# Altium PCB host_board.PcbDoc (part 1 of 3)
Units mm, origin at the board's own origin, x right, y up, seen from the top; angles counter-clockwise.
Board outline 82.44 x 55.58 mm, 4 copper layers (Top Layer, GND, Power, Bottom Layer), stack 1.594 mm thick; 220 components, 249 nets, 1076 pads, 228 vias.
Unrouted connection lines stored in the file: 688.
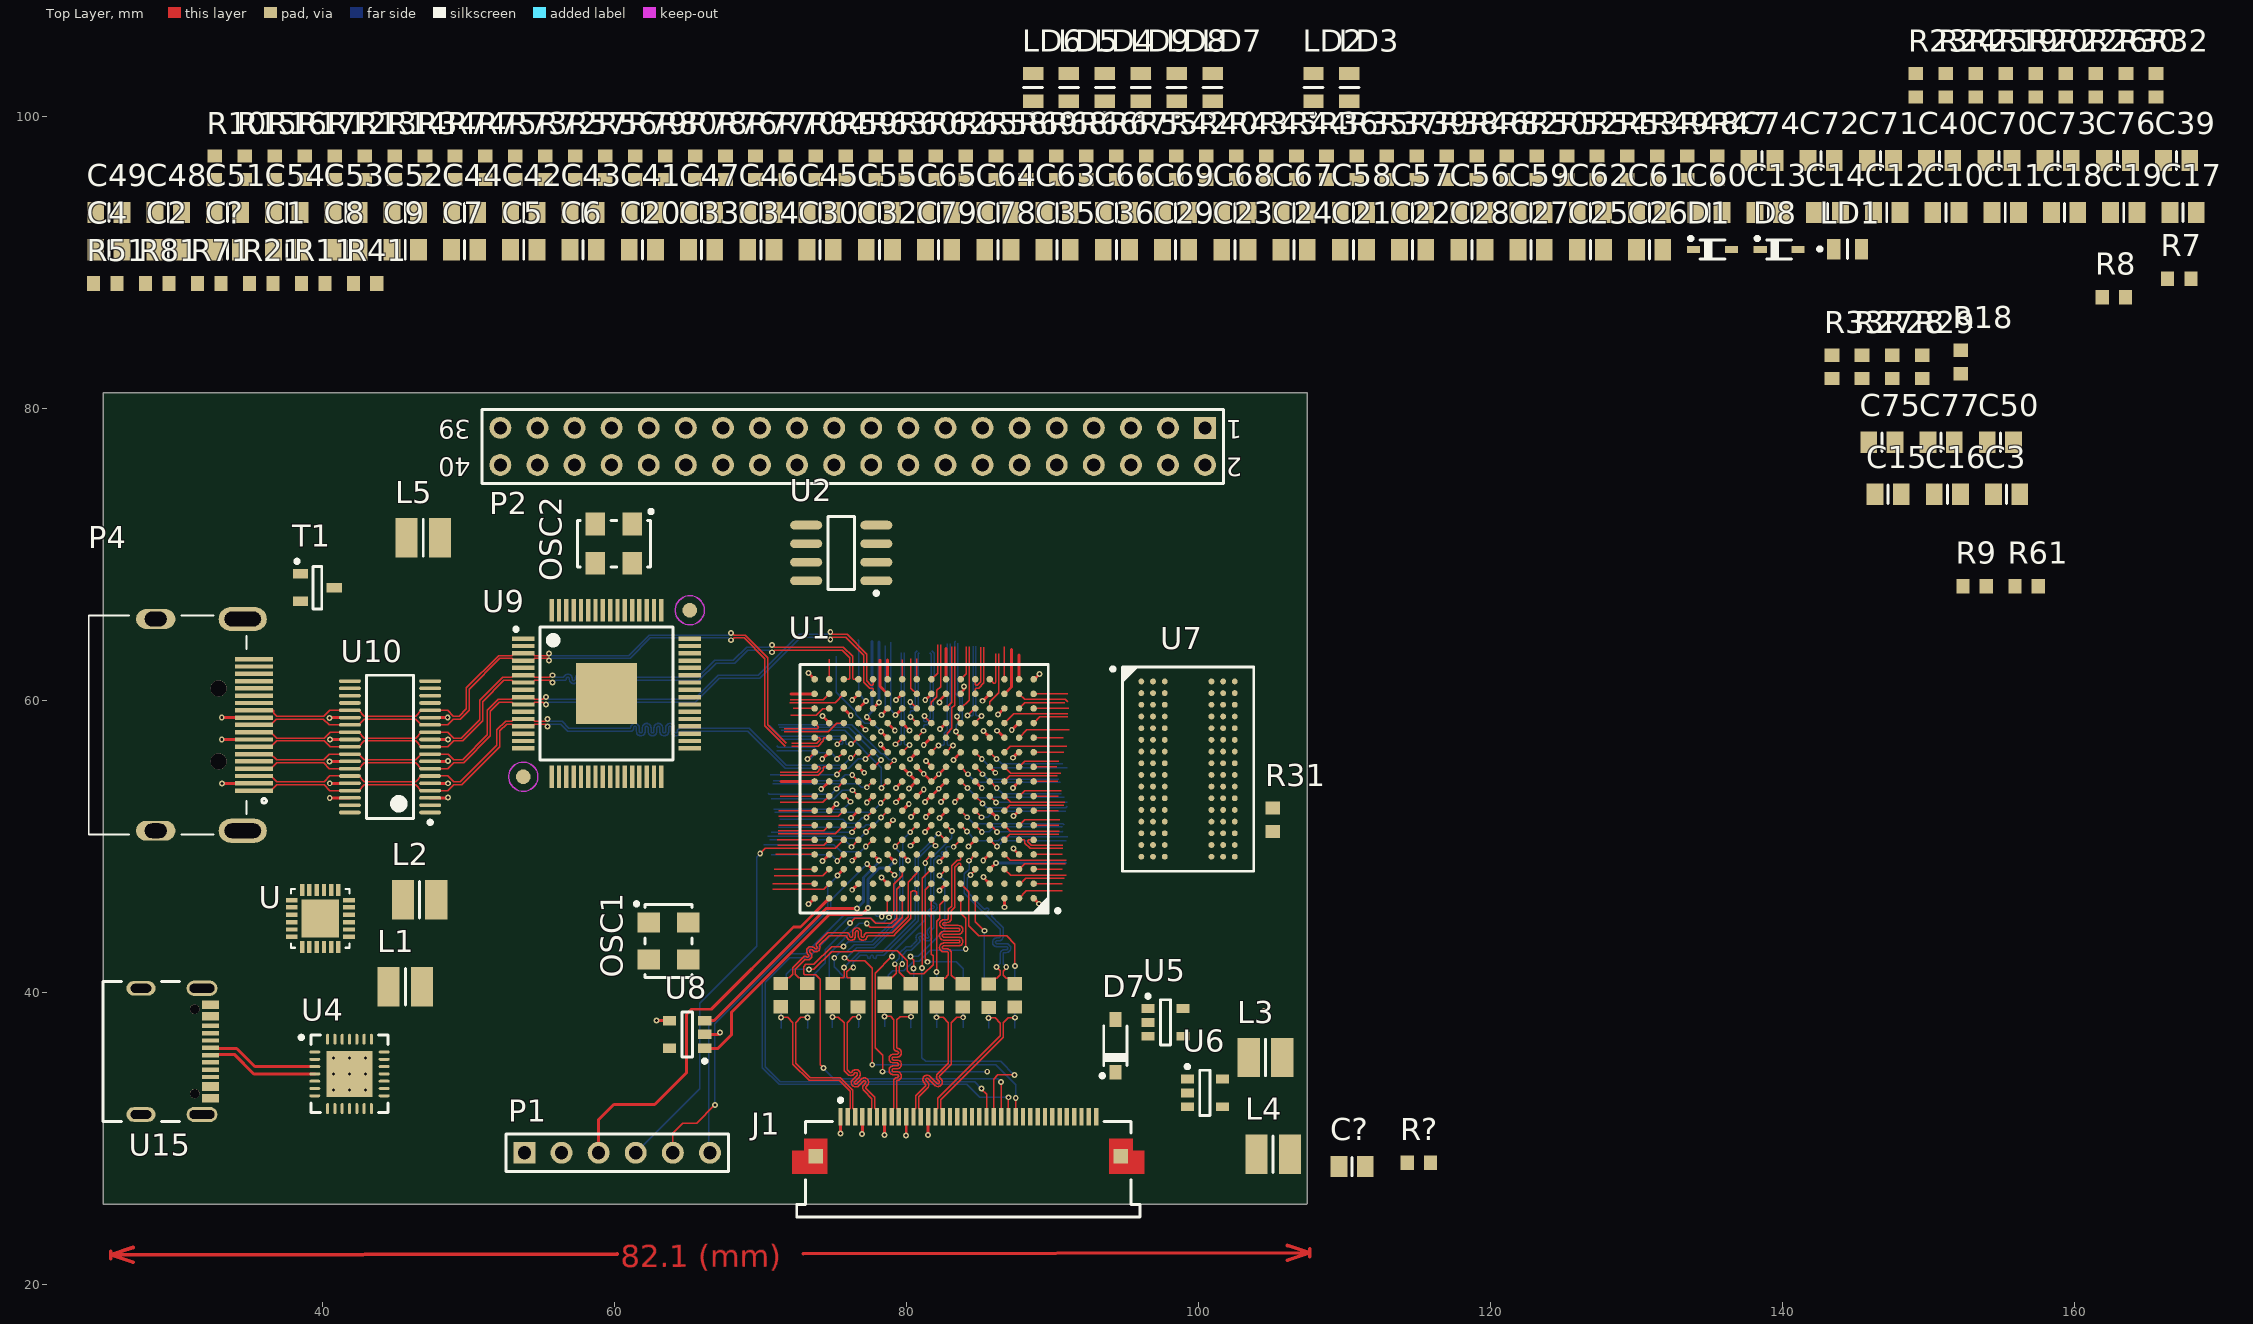
[diagram p0: Top Layer view]
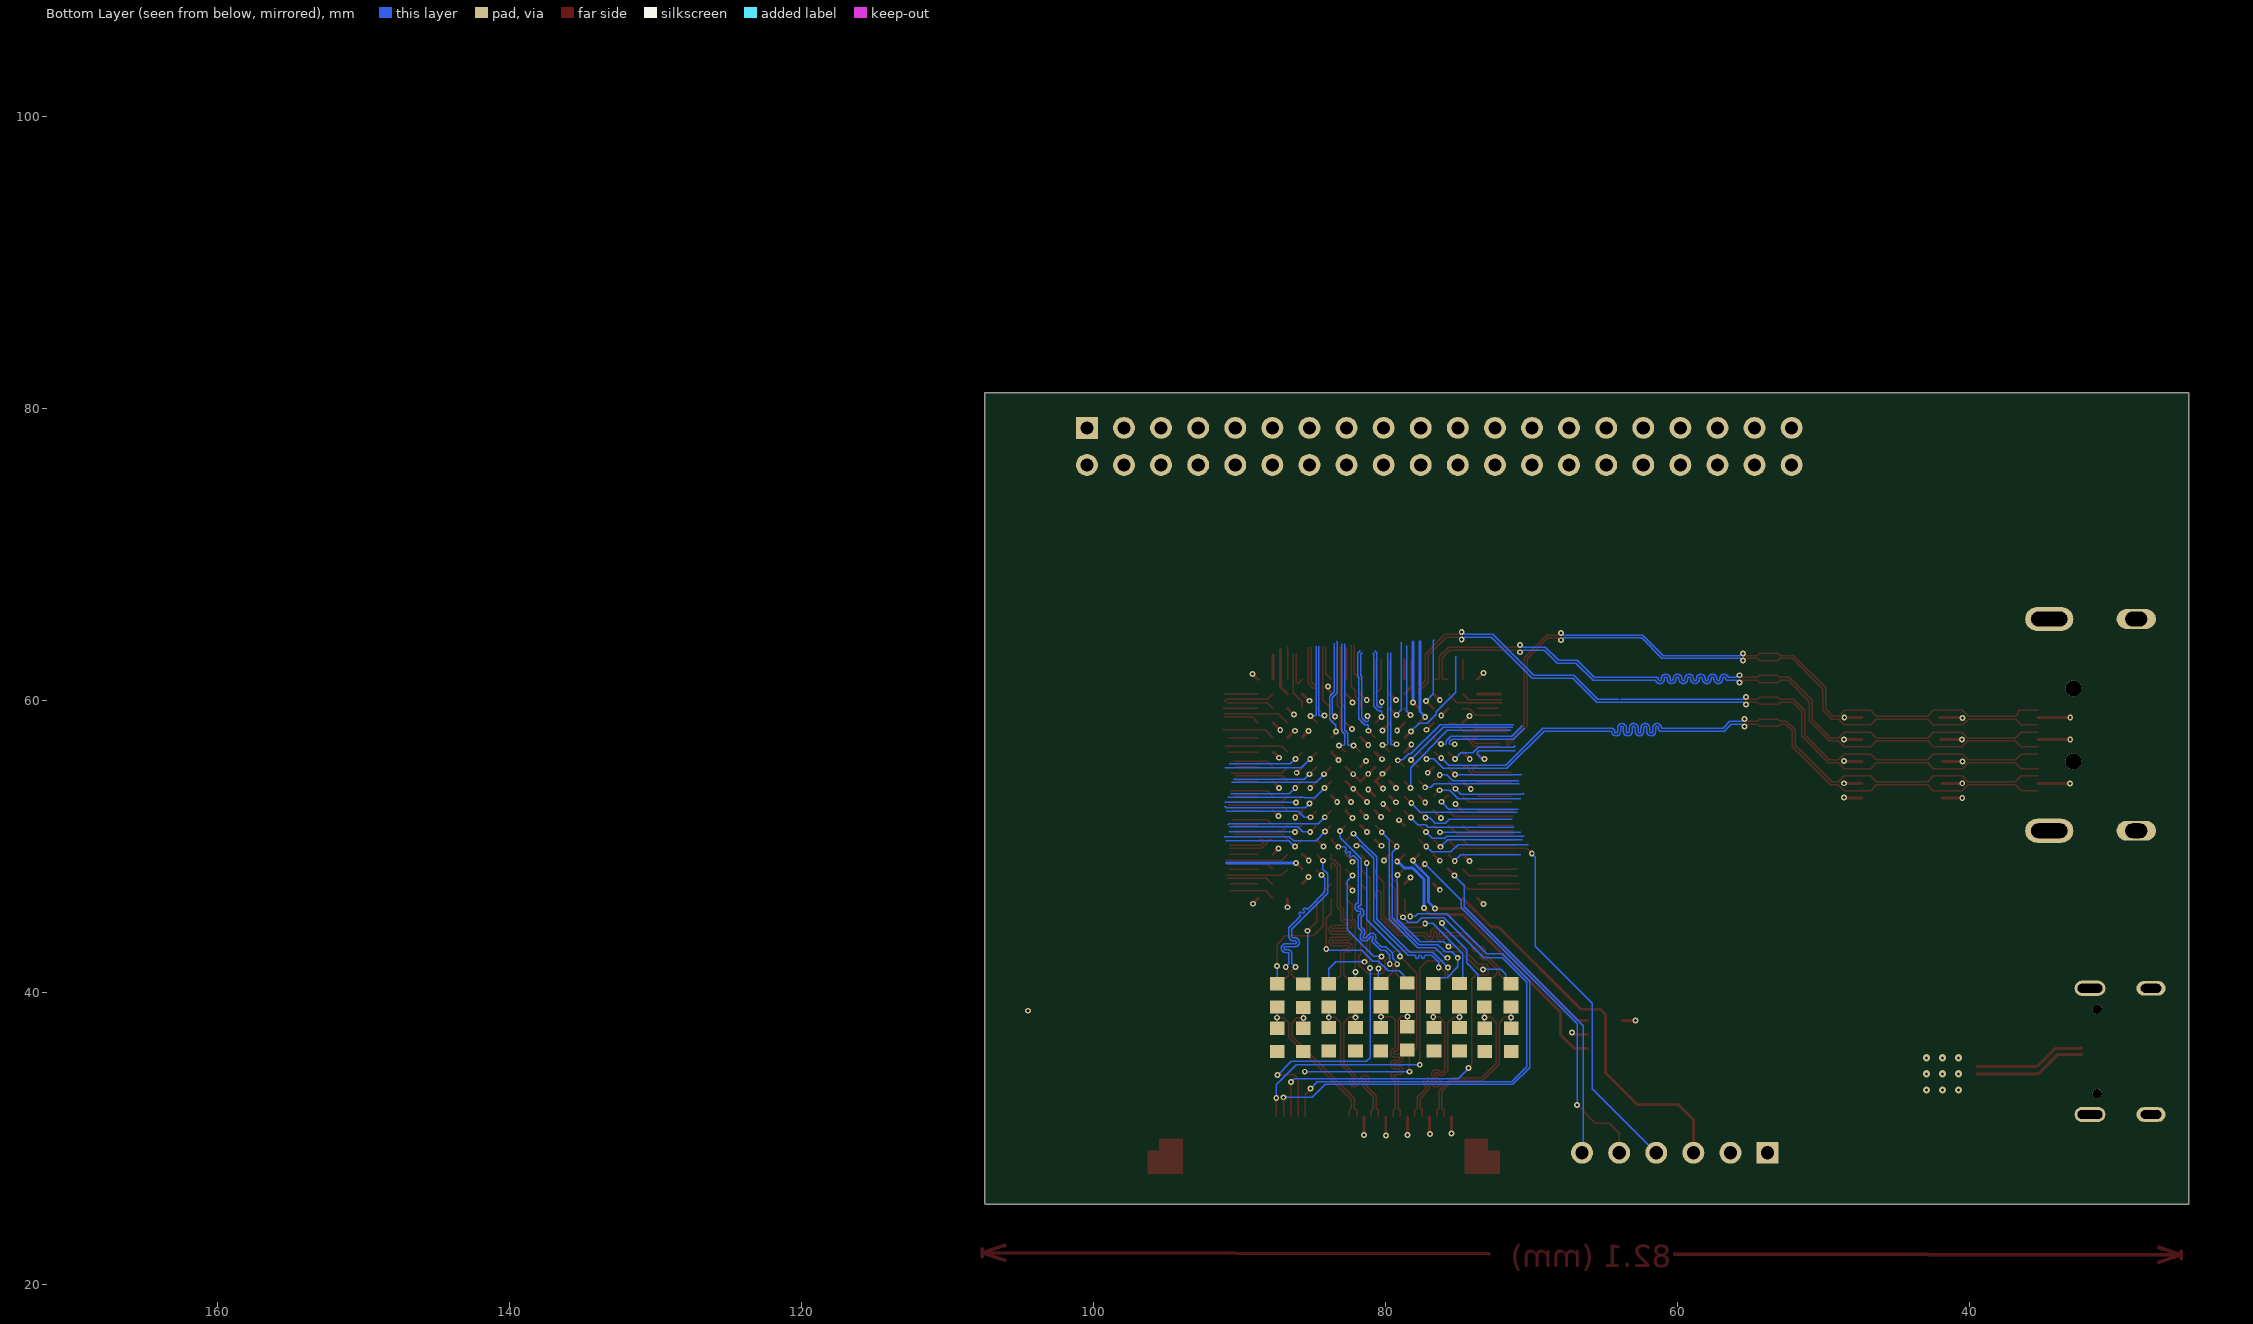
[diagram p1: Bottom Layer view, seen from below]
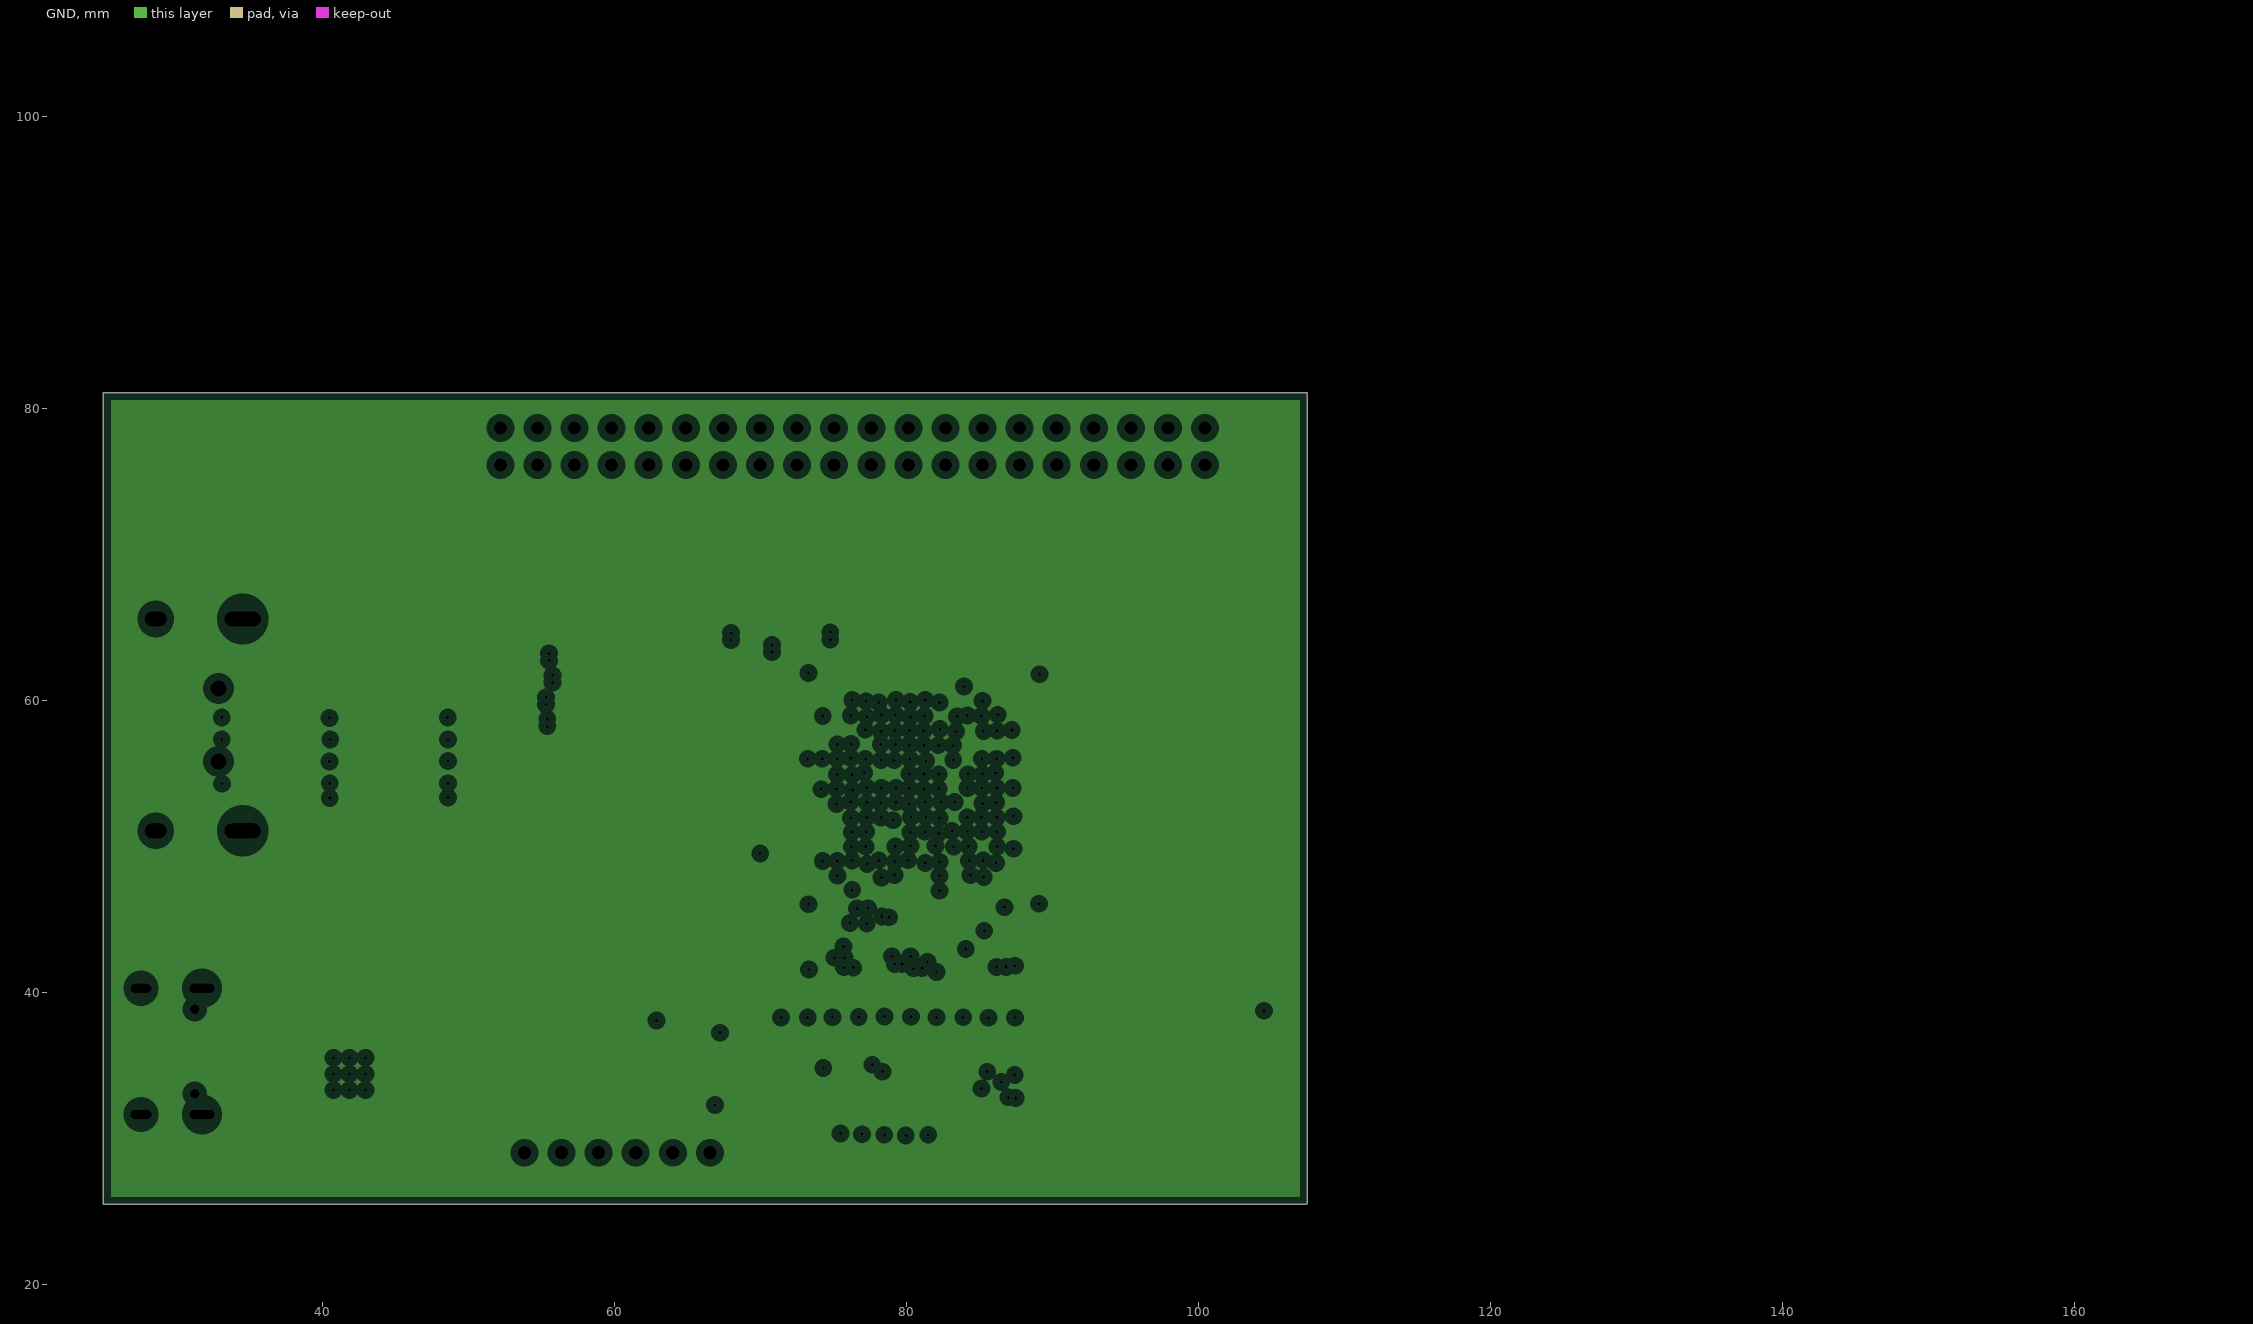
[diagram p2: GND, clearances drawn from the general rule]
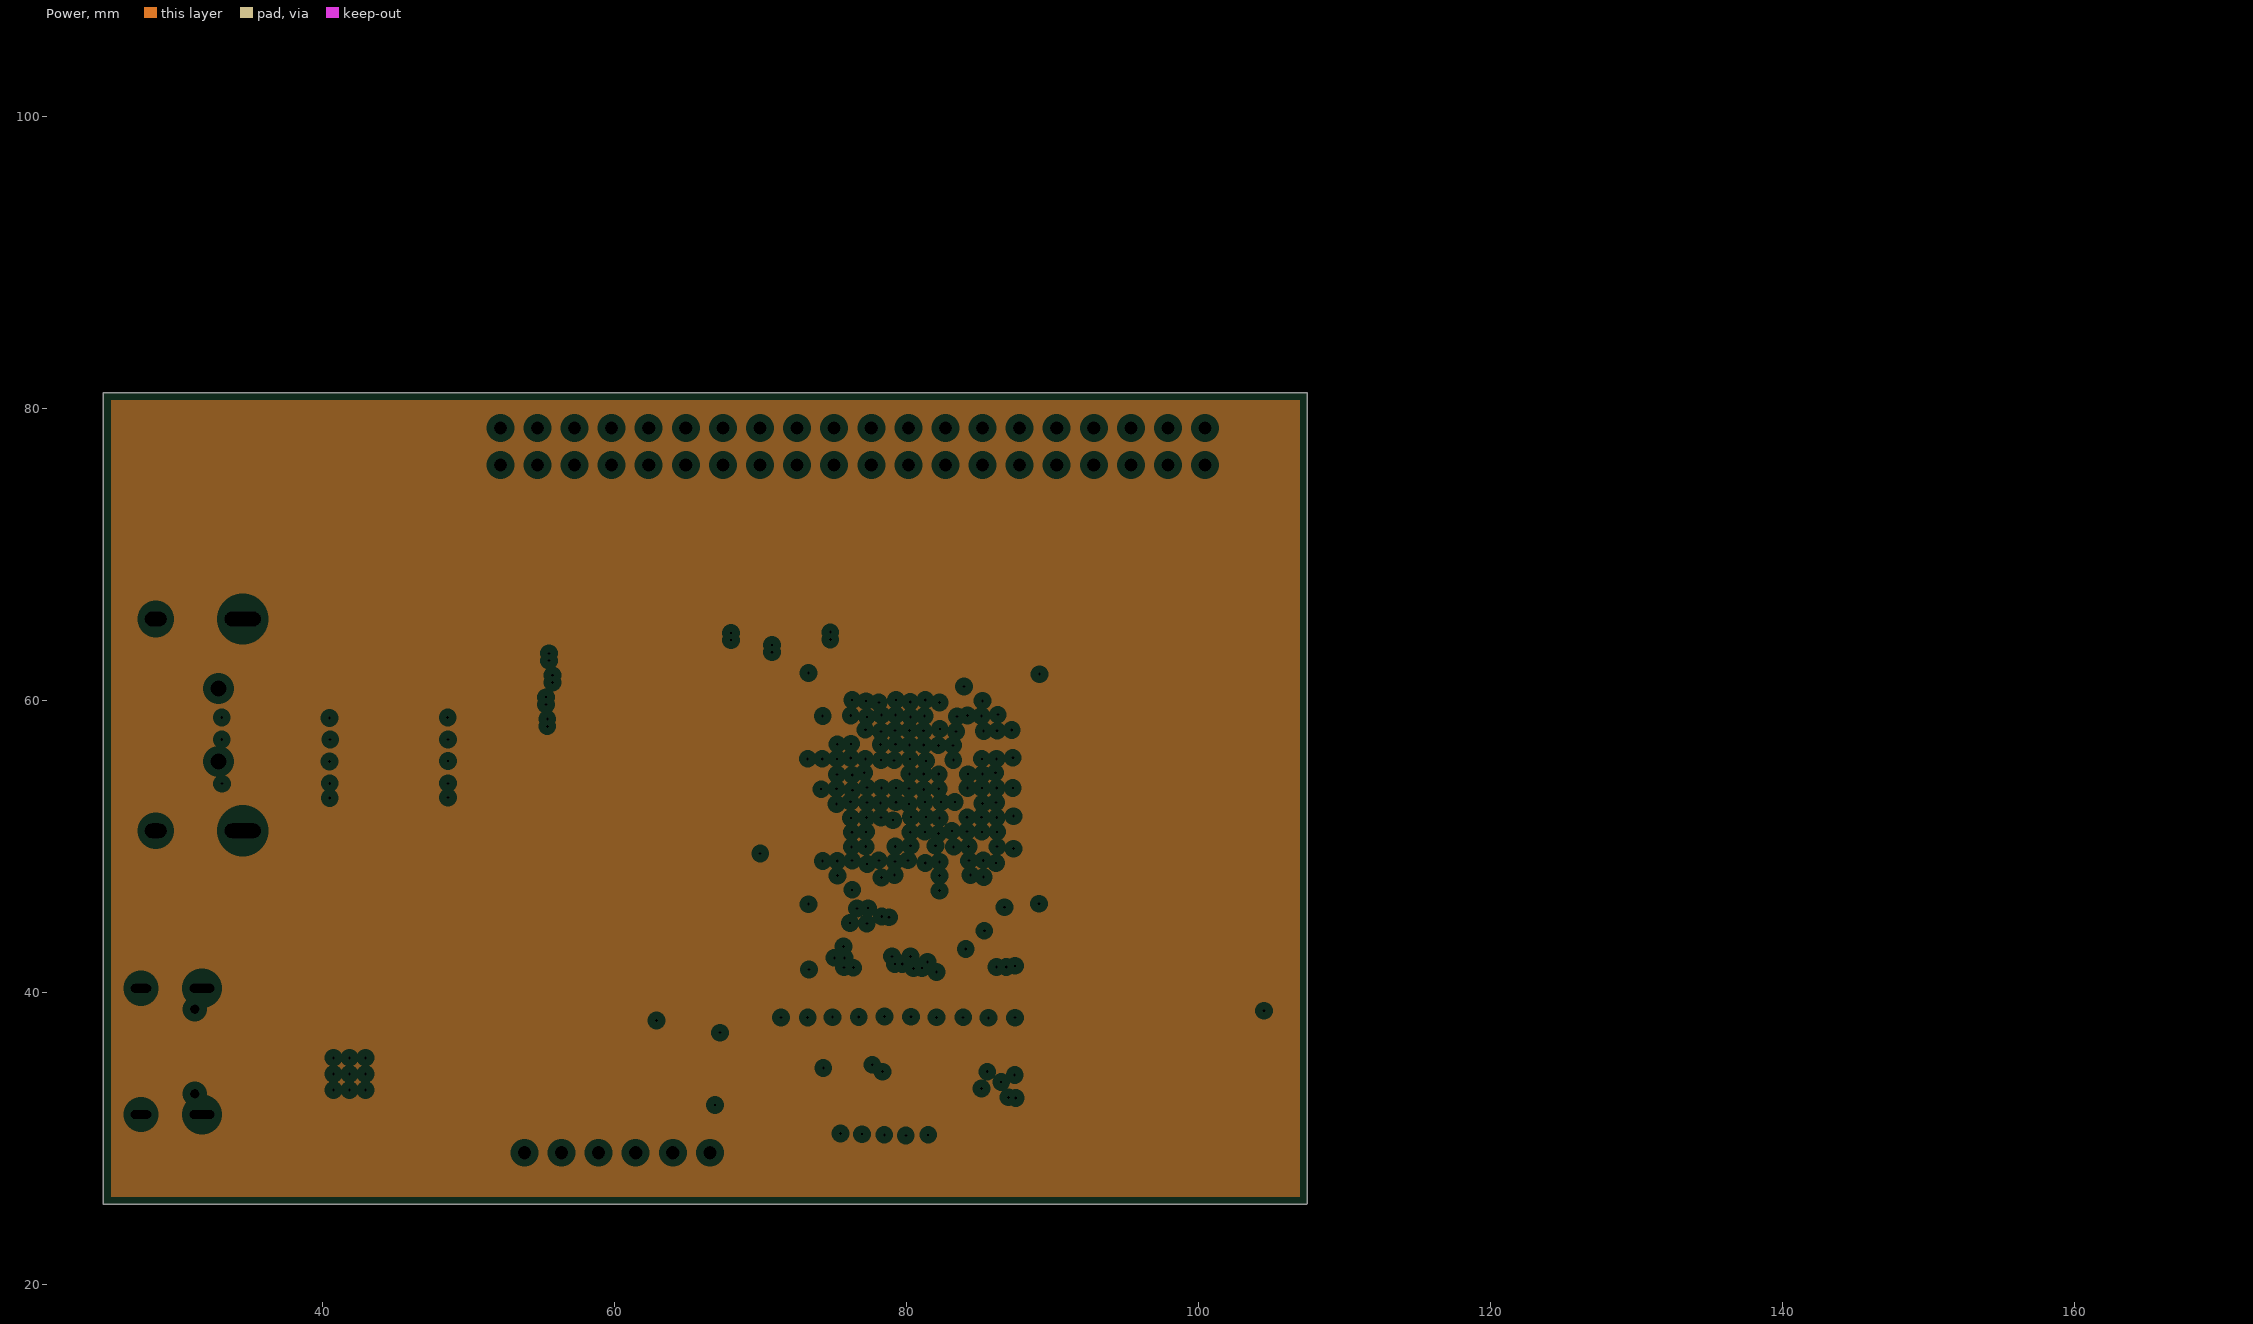
[diagram p3: Power, clearances drawn from the general rule]

## Layer stack, top to bottom
Top Solder: solder mask 0.0102, Solder Resist, Dk 3.5
Top Layer: signal copper 0.036
Dielectric 2: prepreg 0.125, PP-016, Dk 4.4
GND: plane copper 0.036
Dielectric 1: dielectric 1.2, FR-4, Dk 4.8
Power: plane copper 0.036
Dielectric 3: prepreg 0.125, PP-016, Dk 4.4
Bottom Layer: signal copper 0.036
Bottom Solder: solder mask 0.0102, Solder Resist, Dk 3.5

## Board outline
25,25.524 25,81.1 107.439,81.1 107.439,25.573 107.39,25.524

## Design rules (kind name [scope] priority, off if disabled: settings)
Clearance "Schematic Clearance Constraint_21" [InNet('GPIO_31')] p1: gap=0.1 ignorepadtopadclearanceinfootprint=FALSE
Clearance "Schematic Clearance Constraint_20" [InNet('GPIO_33')] p2: gap=0.1 ignorepadtopadclearanceinfootprint=FALSE
Clearance "Schematic Clearance Constraint_19" [InNet('GPIO_34')] p3: gap=0.1 ignorepadtopadclearanceinfootprint=FALSE
Clearance "Schematic Clearance Constraint_18" [InNet('GPIO_32')] p4: gap=0.1 ignorepadtopadclearanceinfootprint=FALSE
Clearance "Schematic Clearance Constraint_17" [InNet('GPIO12_N')] p5: gap=0.1 ignorepadtopadclearanceinfootprint=FALSE
Clearance "Schematic Clearance Constraint_16" [InNet('GPIO12_P')] p6: gap=0.1 ignorepadtopadclearanceinfootprint=FALSE
Clearance "Schematic Clearance Constraint_15" [InNet('GPIO13_N')] p7: gap=0.1 ignorepadtopadclearanceinfootprint=FALSE
Clearance "Schematic Clearance Constraint_14" [InNet('GPIO13_P')] p8: gap=0.1 ignorepadtopadclearanceinfootprint=FALSE
Clearance "Schematic Clearance Constraint_13" [InNet('GPIO14_N')] p9: gap=0.1 ignorepadtopadclearanceinfootprint=FALSE
Clearance "Schematic Clearance Constraint_12" [InNet('GPIO14_P')] p10: gap=0.1 ignorepadtopadclearanceinfootprint=FALSE
Clearance "Schematic Clearance Constraint_11" [InNet('GPIO15_N')] p11: gap=0.1 ignorepadtopadclearanceinfootprint=FALSE
Clearance "Schematic Clearance Constraint_10" [InNet('GPIO15_P')] p12: gap=0.1 ignorepadtopadclearanceinfootprint=FALSE
Clearance "Schematic Clearance Constraint_9" [InNetClass('JTAG')] p13: gap=0.1 ignorepadtopadclearanceinfootprint=FALSE
Clearance "Schematic Clearance Constraint_7" [InNetClass('PROG')] p14: gap=0.1 ignorepadtopadclearanceinfootprint=FALSE
Clearance "Schematic Clearance Constraint_8" [InNetClass('DPHY_LANES_CLASS')] p15: gap=0.1 ignorepadtopadclearanceinfootprint=FALSE
Clearance "Schematic Clearance Constraint_2" [InNetClass('GPIO_DIFFPAIR')] p16: gap=0.1 ignorepadtopadclearanceinfootprint=FALSE
Clearance "Schematic Clearance Constraint_5" [InNetClass('HDMI_lines_class')] p17: gap=0.1 ignorepadtopadclearanceinfootprint=FALSE
Clearance "Schematic Clearance Constraint_6" [InNetClass('DPHY_LINES')] p18: gap=0.1 ignorepadtopadclearanceinfootprint=FALSE
Clearance "Schematic Clearance Constraint_4" [InNetClass('DDR_IO')] p19: gap=0.1 ignorepadtopadclearanceinfootprint=FALSE
Clearance "Schematic Clearance Constraint_3" [InNetClass('HDMI_LINES')] p20: gap=0.1 ignorepadtopadclearanceinfootprint=FALSE
Clearance "Schematic Clearance Constraint" [InNetClass('ADV_IO')] p21: gap=0.1 ignorepadtopadclearanceinfootprint=FALSE
Clearance "Schematic Clearance Constraint_1" [InNet('GND')] p22: gap=0.1 ignorepadtopadclearanceinfootprint=FALSE
Clearance [All] p23: gap=0.1 ignorepadtopadclearanceinfootprint=FALSE
DiffPairsRouting "Schematic Differential Pairs Routing_15" [InNetClass('DDR_IO')] p1: maxlimit=0.25 minlimit=0.1 mostfreqgap=0.1 toplayer_minwidth=0.1 toplayer_maxwidth=0.2 toplayer_prefwidth=0.1 bottomlayer_minwidth=0.1 bottomlayer_maxwidth=0.2 bottomlayer_prefwidth=0.1 maxuncoupledlength=12.7
DiffPairsRouting "Schematic Differential Pairs Routing_14" [InNet('GPIO12_N')] p2: maxlimit=0.2 minlimit=0.1 mostfreqgap=0.1 toplayer_minwidth=0.1 toplayer_maxwidth=0.2 toplayer_prefwidth=0.1 bottomlayer_minwidth=0.1 bottomlayer_maxwidth=0.2 bottomlayer_prefwidth=0.1 maxuncoupledlength=12.7
DiffPairsRouting "Schematic Differential Pairs Routing_13" [InNet('GPIO12_P')] p3: maxlimit=0.2 minlimit=0.1 mostfreqgap=0.1 toplayer_minwidth=0.1 toplayer_maxwidth=0.2 toplayer_prefwidth=0.1 bottomlayer_minwidth=0.1 bottomlayer_maxwidth=0.2 bottomlayer_prefwidth=0.1 maxuncoupledlength=12.7
DiffPairsRouting "Schematic Differential Pairs Routing_12" [InNet('GPIO13_N')] p4: maxlimit=0.2 minlimit=0.1 mostfreqgap=0.1 toplayer_minwidth=0.1 toplayer_maxwidth=0.2 toplayer_prefwidth=0.1 bottomlayer_minwidth=0.1 bottomlayer_maxwidth=0.2 bottomlayer_prefwidth=0.1 maxuncoupledlength=12.7
DiffPairsRouting "Schematic Differential Pairs Routing_11" [InNet('GPIO13_P')] p5: maxlimit=0.2 minlimit=0.1 mostfreqgap=0.1 toplayer_minwidth=0.1 toplayer_maxwidth=0.2 toplayer_prefwidth=0.1 bottomlayer_minwidth=0.1 bottomlayer_maxwidth=0.2 bottomlayer_prefwidth=0.1 maxuncoupledlength=12.7
DiffPairsRouting "Schematic Differential Pairs Routing_10" [InNet('GPIO14_N')] p6: maxlimit=0.2 minlimit=0.1 mostfreqgap=0.1 toplayer_minwidth=0.1 toplayer_maxwidth=0.2 toplayer_prefwidth=0.1 bottomlayer_minwidth=0.1 bottomlayer_maxwidth=0.2 bottomlayer_prefwidth=0.1 maxuncoupledlength=12.7
DiffPairsRouting "Schematic Differential Pairs Routing_9" [InNet('GPIO14_P')] p7: maxlimit=0.2 minlimit=0.1 mostfreqgap=0.1 toplayer_minwidth=0.1 toplayer_maxwidth=0.2 toplayer_prefwidth=0.1 bottomlayer_minwidth=0.1 bottomlayer_maxwidth=0.2 bottomlayer_prefwidth=0.1 maxuncoupledlength=12.7
DiffPairsRouting "Schematic Differential Pairs Routing_8" [InNet('GPIO15_N')] p8: maxlimit=0.2 minlimit=0.1 mostfreqgap=0.1 toplayer_minwidth=0.1 toplayer_maxwidth=0.2 toplayer_prefwidth=0.1 bottomlayer_minwidth=0.1 bottomlayer_maxwidth=0.2 bottomlayer_prefwidth=0.1 maxuncoupledlength=12.7
DiffPairsRouting "Schematic Differential Pairs Routing_7" [InNet('GPIO15_P')] p9: maxlimit=0.2 minlimit=0.1 mostfreqgap=0.1 toplayer_minwidth=0.1 toplayer_maxwidth=0.2 toplayer_prefwidth=0.1 bottomlayer_minwidth=0.1 bottomlayer_maxwidth=0.2 bottomlayer_prefwidth=0.1 maxuncoupledlength=12.7
DiffPairsRouting "Schematic Differential Pairs Routing_2" [InNet('DDR_CLK_P')] p10: maxlimit=0.25 minlimit=0.1 mostfreqgap=0.1 toplayer_minwidth=0.1 toplayer_maxwidth=0.1 toplayer_prefwidth=0.1 bottomlayer_minwidth=0.1 bottomlayer_maxwidth=0.1 bottomlayer_prefwidth=0.1 maxuncoupledlength=12.7
DiffPairsRouting "Schematic Differential Pairs Routing_6" [InNetClass('DPHY_LANES_CLASS')] p11: maxlimit=0.2 minlimit=0.1 mostfreqgap=0.1 toplayer_minwidth=0.1 toplayer_maxwidth=0.2 toplayer_prefwidth=0.1 bottomlayer_minwidth=0.1 bottomlayer_maxwidth=0.2 bottomlayer_prefwidth=0.1 maxuncoupledlength=12.7
DiffPairsRouting "Schematic Differential Pairs Routing_4" [InNetClass('USB_LINES')] p12: maxlimit=0.3 minlimit=0.2 mostfreqgap=0.2 toplayer_minwidth=0.2 toplayer_maxwidth=0.3 toplayer_prefwidth=0.2 bottomlayer_minwidth=0.2 bottomlayer_maxwidth=0.3 bottomlayer_prefwidth=0.2 maxuncoupledlength=12.7
DiffPairsRouting "Schematic Differential Pairs Routing_3" [InNetClass('GPIO_DIFFPAIR')] p13: maxlimit=0.2 minlimit=0.1 mostfreqgap=0.1 toplayer_minwidth=0.1 toplayer_maxwidth=0.2 toplayer_prefwidth=0.1 bottomlayer_minwidth=0.1 bottomlayer_maxwidth=0.2 bottomlayer_prefwidth=0.1 maxuncoupledlength=12.7
DiffPairsRouting "Schematic Differential Pairs Routing_27" [InNetClass('DPHY_LANE_HS')] p14: maxlimit=0.2 minlimit=0.1 mostfreqgap=0.1 toplayer_minwidth=0.1 toplayer_maxwidth=0.2 toplayer_prefwidth=0.1 bottomlayer_minwidth=0.1 bottomlayer_maxwidth=0.2 bottomlayer_prefwidth=0.1 maxuncoupledlength=12.7
DiffPairsRouting "Schematic Differential Pairs Routing_1" [InNet('DDR_CLK_P')] p15: maxlimit=0.25 minlimit=0.15 mostfreqgap=0.2 toplayer_minwidth=0.15 toplayer_maxwidth=0.25 toplayer_prefwidth=0.2 bottomlayer_minwidth=0.15 bottomlayer_maxwidth=0.25 bottomlayer_prefwidth=0.2 maxuncoupledlength=12.7
DiffPairsRouting "Schematic Differential Pairs Routing" [InNetClass('HDMI_lines_class')] p16: maxlimit=0.25 minlimit=0.1 mostfreqgap=0.1 toplayer_minwidth=0.1 toplayer_maxwidth=0.1 toplayer_prefwidth=0.1 bottomlayer_minwidth=0.1 bottomlayer_maxwidth=0.1 bottomlayer_prefwidth=0.1 maxuncoupledlength=12.7
MatchedLengths "Schematic Matched Net Lengths_1" [InNetClass('HDMI_lines_class')] p1: tolerance=1 checknetsindiffpair=FALSE checkdiffpairvsdiffpair=TRUE checkxsignals=TRUE checkothers=TRUE
MatchedLengths "Schematic Matched Net Lengths_4" [InNetClass('DPHY_LANES_CLASS')] p2: tolerance=1 checknetsindiffpair=TRUE checkdiffpairvsdiffpair=FALSE checkxsignals=FALSE checkothers=FALSE
MatchedLengths "Schematic Matched Net Lengths_3" [InNetClass('DPHY_LANE_HS')] p3: tolerance=1 checknetsindiffpair=TRUE checkdiffpairvsdiffpair=FALSE checkxsignals=FALSE checkothers=FALSE
MatchedLengths [InDifferentialPair('DPHY_HS0')] p4: tolerance=25.4 checknetsindiffpair=TRUE checkdiffpairvsdiffpair=FALSE checkxsignals=FALSE checkothers=FALSE
MatchedLengths "Schematic Matched Net Lengths_2" [InNetClass('DPHY_LANE_HS')] p5: tolerance=25.4 checknetsindiffpair=FALSE checkdiffpairvsdiffpair=TRUE checkxsignals=TRUE checkothers=TRUE
MatchedLengths "Schematic Matched Net Lengths" [InNetClass('ADV_IO')] p6: tolerance=8 checknetsindiffpair=FALSE checkdiffpairvsdiffpair=TRUE checkxsignals=TRUE checkothers=TRUE
PlaneClearance [All] p1: clearance=0.508
PlaneConnect [All] p1: planeconnectstyle=Relief reliefexpansion=0.508 reliefentries=4 reliefconductorwidth=0.254 reliefairgap=0.254
PolygonConnect [All] p1: connectstyle=Relief reliefconductorwidth=0.254 reliefentries=4 polygonreliefangle="90 Angle" airgapwidth=0.254
RoutingVias [All] p1: holewidth=0.3 width=0.4 viastyle="Through Hole" minholewidth=0.1 minwidth=0.2 maxholewidth=0.3 maxwidth=0.4
SolderMaskExpansion [All] p1: expansion=0.102
Width "Schematic Width Constraint_11" [InNet('GPIO_31')] p1: maxlimit=0.2 minlimit=0.1 preferedwidth=0.1
Width "Schematic Width Constraint_10" [InNet('GPIO_32')] p2: maxlimit=0.2 minlimit=0.1 preferedwidth=0.1
Width "Schematic Width Constraint_9" [InNet('GPIO_33')] p3: maxlimit=0.2 minlimit=0.1 preferedwidth=0.1
Width "Schematic Width Constraint_4" [InNet('GPIO_34')] p4: maxlimit=0.2 minlimit=0.1 preferedwidth=0.1
Width "Schematic Width Constraint_3" [InNetClass('JTAG')] p5: maxlimit=0.2 minlimit=0.1 preferedwidth=0.1
Width "Schematic Width Constraint" [InNetClass('PROG')] p6: maxlimit=0.2 minlimit=0.1 preferedwidth=0.1
Width "Schematic Width Constraint_1" [InNetClass('HDMI_lines_class')] p7: maxlimit=0.2 minlimit=0.1 preferedwidth=0.1
Width "Schematic Width Constraint_8" [InNetClass('ADV_IO')] p8: maxlimit=0.2 minlimit=0.1 preferedwidth=0.1
Width "Schematic Width Constraint_7" [InNetClass('DDR_IO')] p9: maxlimit=0.2 minlimit=0.1 preferedwidth=0.1
Width "Schematic Width Constraint_6" [InNetClass('DPHY_LINES')] p10: maxlimit=0.2 minlimit=0.1 preferedwidth=0.1
Width "Schematic Width Constraint_5" [InNetClass('HDMI_LINES')] p11: maxlimit=0.2 minlimit=0.1 preferedwidth=0.1
Width "Schematic Width Constraint_2" [InNet('DDR_CLK_P')] p12: maxlimit=0.254 minlimit=0.15 preferedwidth=0.254
Width [All] p13: maxlimit=0.254 minlimit=0.1 preferedwidth=0.2
27 further rules are at their usual default settings.

## Classes and differential pairs
net class PROG: CFG_CCLK CFG_CS CFG_DONE CFG_MISO CFG_MOSI
net class JTAG: TCK TDI TDO TMS
net class DPHY_LANES_CLASS: DPHY_Designator2_N DPHY_Designator2_P DPHY_Designator3_N DPHY_Designator3_P DPHY_Designator4_N DPHY_Designator4_P DPHY_Designator5_N DPHY_Designator5_P DPHY_Designator6_N DPHY_Designator6_P
net class USB_LINES: USB_N USB_P
net class GPIO_DIFFPAIR: GPIO0_N GPIO0_P GPIO1_N GPIO1_P GPIO2_N GPIO2_P GPIO3_N GPIO3_P GPIO4_N GPIO4_P GPIO5_N GPIO5_P GPIO6_N GPIO6_P GPIO7_N GPIO7_P GPIO8_N GPIO8_P GPIO9_N GPIO9_P GPIO10_N GPIO10_P GPIO11_N GPIO11_P
net class HDMI_LINES: HDMI_CEC_LV HDMI_SCL_LV HDMI_SDA_LV HDP_EN HPD_NOTIF
net class DPHY_LINES: DPHY_LP_CLK_N DPHY_LP_CLK_P DPHY_LP_N0 DPHY_LP_N1 DPHY_LP_N2 DPHY_LP_N3 DPHY_LP_P0 DPHY_LP_P1 DPHY_LP_P2 DPHY_LP_P3 DSI_GPIO0 DSI_GPIO1 DSI_GPIO2 DSI_GPIO3 DSI_RESET_N LCD_PWREN
net class DPHY_LANE_HS: DPHY_HS0_N DPHY_HS0_P DPHY_HS1_N DPHY_HS1_P DPHY_HS2_N DPHY_HS2_P DPHY_HS3_N DPHY_HS3_P DPHY_HS_CLK_N DPHY_HS_CLK_P
net class ADV_IO: HDMI_CFG_SCL HDMI_CFG_SDA HDMI_D0 HDMI_D1 HDMI_D2 HDMI_D3 HDMI_D4 HDMI_D5 HDMI_D6 HDMI_D7 HDMI_D8 HDMI_D9 HDMI_D10 HDMI_D11 HDMI_D12 HDMI_D13 HDMI_D14 HDMI_D15 HDMI_D16 HDMI_D17 HDMI_D18 HDMI_D19 HDMI_D20 HDMI_D21 HDMI_D22 HDMI_D23 HDMI_DE HDMI_HS HDMI_LCC HDMI_RST_N HDMI_VS
net class HDMI_lines_class: TMDS0_N TMDS0_P TMDS1_N TMDS1_P TMDS2_N TMDS2_P TMDS_CLK_N TMDS_CLK_P
net class DDR_IO: DDR_A0 DDR_A1 DDR_A2 DDR_A3 DDR_A4 DDR_A5 DDR_A6 DDR_A7 DDR_A8 DDR_A9 DDR_A10 DDR_A11 DDR_A12 DDR_A13 DDR_A14 DDR_BA0 DDR_BA1 DDR_BA2 DDR_CAS DDR_CKE DDR_CLK_N DDR_CLK_P DDR_D0 DDR_D1 DDR_D2 DDR_D3 DDR_D4 DDR_D5 DDR_D6 DDR_D7 DDR_D8 DDR_D9 DDR_D10 DDR_D11 DDR_D12 DDR_D13 DDR_D14 DDR_D15 DDR_DM0 DDR_DM1 DDR_LDQS0 DDR_LDQS1 DDR_ODT DDR_RAS DDR_RESETN DDR_UDQS0 DDR_UDQS1 DDR_WE
channel class d-phy_block: Designator2 Designator3 Designator4 Designator5 Designator6
net class HDMI_D[0..23]: HDMI_D0 HDMI_D1 HDMI_D2 HDMI_D3 HDMI_D4 HDMI_D5 HDMI_D6 HDMI_D7 HDMI_D8 HDMI_D9 HDMI_D10 HDMI_D11 HDMI_D12 HDMI_D13 HDMI_D14 HDMI_D15 HDMI_D16 HDMI_D17 HDMI_D18 HDMI_D19 HDMI_D20 HDMI_D21 HDMI_D22 HDMI_D23
net class DDR_UDQS[0..1]: DDR_UDQS0 DDR_UDQS1
net class DDR_LDQS[0..1]: DDR_LDQS0 DDR_LDQS1
net class DDR_DM[0..1]: DDR_DM0 DDR_DM1
net class DDR_D[0..15]: DDR_D0 DDR_D1 DDR_D2 DDR_D3 DDR_D4 DDR_D5 DDR_D6 DDR_D7 DDR_D8 DDR_D9 DDR_D10 DDR_D11 DDR_D12 DDR_D13 DDR_D14 DDR_D15
net class DDR_BA[0..2]: DDR_BA0 DDR_BA1 DDR_BA2
net class DDR_A[0..14]: DDR_A0 DDR_A1 DDR_A2 DDR_A3 DDR_A4 DDR_A5 DDR_A6 DDR_A7 DDR_A8 DDR_A9 DDR_A10 DDR_A11 DDR_A12 DDR_A13 DDR_A14
component class "SDRAM DDR3": C1 C2 C3 C4 C5 C6 C7 C8 C9 C10 C11 C12 C13 R7 R8 R9 R10 R11 R12 R30 R31 U7
component class host_board: J1
component class Designator: C30 C39 C40 C41 C42 C43 C44 C45 C46 C47 C48 C49 C50 C51 C52 C53 C54 C55 C56 C57 C58 C59 C60 C61 C? D8 LD1 LD2 OSC1 P1 P2 R13 R32 R33 R34 R35 R36 R37 R38 R39 R40 R41 R42 R43 R44 R45 R46 R47 R48 R49 R57 R60 R63 R64 R65 R66 R67 R68 R69 R75 U1 U2 U8
differential pair DPHY_Designator6: +DPHY_Designator6_P -DPHY_Designator6_N
differential pair DPHY_Designator5: +DPHY_Designator5_P -DPHY_Designator5_N
differential pair DPHY_Designator4: +DPHY_Designator4_P -DPHY_Designator4_N
differential pair DPHY_Designator3: +DPHY_Designator3_P -DPHY_Designator3_N
differential pair DPHY_Designator2: +DPHY_Designator2_P -DPHY_Designator2_N
differential pair USB: +USB_P -USB_N
differential pair TMDS_CLK: +TMDS_CLK_P -TMDS_CLK_N
differential pair TMDS2: +TMDS2_P -TMDS2_N
differential pair TMDS1: +TMDS1_P -TMDS1_N
differential pair TMDS0: +TMDS0_P -TMDS0_N
differential pair GPIO15: +GPIO15_P -GPIO15_N
differential pair GPIO14: +GPIO14_P -GPIO14_N
differential pair GPIO13: +GPIO13_P -GPIO13_N
differential pair GPIO12: +GPIO12_P -GPIO12_N
differential pair GPIO11: +GPIO11_P -GPIO11_N
differential pair GPIO10: +GPIO10_P -GPIO10_N
differential pair GPIO9: +GPIO9_P -GPIO9_N
differential pair GPIO8: +GPIO8_P -GPIO8_N
differential pair GPIO7: +GPIO7_P -GPIO7_N
differential pair GPIO6: +GPIO6_P -GPIO6_N
differential pair GPIO5: +GPIO5_P -GPIO5_N
differential pair GPIO4: +GPIO4_P -GPIO4_N
differential pair GPIO3: +GPIO3_P -GPIO3_N
differential pair GPIO2: +GPIO2_P -GPIO2_N
differential pair GPIO1: +GPIO1_P -GPIO1_N
differential pair GPIO0: +GPIO0_P -GPIO0_N
differential pair DPHY_HS_CLK: +DPHY_HS_CLK_P -DPHY_HS_CLK_N
differential pair DPHY_HS3: +DPHY_HS3_P -DPHY_HS3_N
differential pair DPHY_HS2: +DPHY_HS2_P -DPHY_HS2_N
differential pair DPHY_HS1: +DPHY_HS1_P -DPHY_HS1_N
differential pair DPHY_HS0: +DPHY_HS0_P -DPHY_HS0_N
differential pair DDR_CLK: +DDR_CLK_P -DDR_CLK_N

## Components (designator, comment, footprint, x,y, rotation, side; value= is the part's Value field where it differs from the comment)
C1 "100nF" CAPC2013X100N 37.553,90.885 r0 top value=1.5nF
C2 "100nF" CAPC2013X100N 29.437,90.885 r0 top value=1.5nF
C3 "100nF" CAPC2013X100N 155.333,74.143 r0 top value=1.5nF
C4 "100nF" CAPC2013X100N 25.379,90.885 r0 top value=1.5nF
C5 "100nF" CAPC2013X100N 53.785,90.885 r0 top value=1.5nF
C6 "4.7uF 10V" CAPC2013X100N 57.843,90.885 r0 top value=1.5nF
C7 "4.7uF 10V" CAPC2013X100N 49.727,90.885 r0 top value=1.5nF
C8 "100nF" CAPC2013X100N 41.611,90.885 r0 top value=1.5nF
C9 "100nF" CAPC2013X100N 45.669,90.885 r0 top value=1.5nF
C10 "4.7uF 10V" CAPC2013X100N 151.177,93.443 r0 top value=1.5nF
C11 "4.7uF 10V" CAPC2013X100N 155.235,93.443 r0 top value=1.5nF
C12 "100nF" CAPC2013X100N 147.119,93.443 r0 top value=1.5nF
C13 "100nF" CAPC2013X100N 139.003,93.443 r0 top value=1.5nF
C14 "100nF" CAPC2013X100N 143.061,93.443 r0 top value=1.5nF
C15 "1uF" CAPC2013X100N 147.217,74.143 r0 top value=1.5nF
C16 "100nF" CAPC2013X100N 151.275,74.143 r0 top value=1.5nF
C17 "4.7uF" CAPC2013X100N 167.409,93.443 r0 top value=1.5nF
C18 "4.7uF" CAPC2013X100N 159.293,93.443 r0 top value=1.5nF
C19 "1uF" CAPC2013X100N 163.351,93.443 r0 top value=1.5nF
C20 "1uF" CAPC2013X100N 61.901,90.885 r0 top value=1.5nF
C21 "1uF" CAPC2013X100N 110.597,90.885 r0 top value=1.5nF
C22 "1uF" CAPC2013X100N 114.655,90.885 r0 top value=1.5nF
C23 "1uF" CAPC2013X100N 102.481,90.885 r0 top value=1.5nF
C24 "1uF" CAPC2013X100N 106.539,90.885 r0 top value=1.5nF
C25 "1uF" CAPC2013X100N 126.829,90.885 r0 top value=1.5nF
C26 "1uF" CAPC2013X100N 130.887,90.885 r0 top value=1.5nF
C27 "1uF" CAPC2013X100N 122.771,90.885 r0 top value=1.5nF
C28 "4.7uF" CAPC2013X100N 118.713,90.885 r0 top value=1.5nF
C29 "1uF" CAPC2013X100N 98.423,90.885 r0 top value=1.5nF
C30 "100nF" CAPC2013X100N 74.075,90.885 r0 top value=1.5nF
C32 "4.7uF" CAPC2013X100N 78.133,90.885 r0 top value=1.5nF
C33 "1uF" CAPC2013X100N 65.959,90.885 r0 top value=1.5nF
C34 "4.7uF" CAPC2013X100N 70.017,90.885 r0 top value=1.5nF
C35 "1uF" CAPC2013X100N 90.307,90.885 r0 top value=1.5nF
C36 "22pF" CAPC2013X100N 94.365,90.885 r0 top value=1.5nF
C39 "100nF" CAPC2013X100N 166.975,97.001 r0 top value=1.5nF
C40 "1uF" CAPC2013X100N 150.743,97.001 r0 top value=1.5nF
C41 "100nF" CAPC2013X100N 61.901,93.443 r0 top value=1.5nF
C42 "100nF" CAPC2013X100N 53.785,93.443 r0 top value=1.5nF
C43 "1uF" CAPC2013X100N 57.843,93.443 r0 top value=1.5nF
C44 "100nF" CAPC2013X100N 49.727,93.443 r0 top value=1.5nF
C45 "100nF" CAPC2013X100N 74.075,93.443 r0 top value=1.5nF
C46 "100nF" CAPC2013X100N 70.017,93.443 r0 top value=1.5nF
C47 "1uF" CAPC2013X100N 65.959,93.443 r0 top value=1.5nF
C48 "100nF" CAPC2013X100N 29.437,93.443 r0 top value=1.5nF
C49 "100nF" CAPC2013X100N 25.379,93.443 r0 top value=1.5nF
C50 "1uF" CAPC2013X100N 154.899,77.701 r0 top value=1.5nF
C51 "100nF" CAPC2013X100N 33.495,93.443 r0 top value=1.5nF
C52 "100nF" CAPC2013X100N 45.669,93.443 r0 top value=1.5nF
C53 "100nF" CAPC2013X100N 41.611,93.443 r0 top value=1.5nF
C54 "1uF" CAPC2013X100N 37.553,93.443 r0 top value=1.5nF
C55 "100nF" CAPC2013X100N 78.133,93.443 r0 top value=1.5nF
C56 "100nF" CAPC2013X100N 118.713,93.443 r0 top value=1.5nF
C57 "1uF" CAPC2013X100N 114.655,93.443 r0 top value=1.5nF
C58 "100nF" CAPC2013X100N 110.597,93.443 r0 top value=1.5nF
C59 "100nF" CAPC2013X100N 122.771,93.443 r0 top value=1.5nF
C60 "100nF" CAPC2013X100N 134.945,93.443 r0 top value=1.5nF
C61 "100nF" CAPC2013X100N 130.887,93.443 r0 top value=1.5nF
C62 "100nF" CAPC2013X100N 126.829,93.443 r0 top value=1.5nF
C63 "100nF" CAPC2013X100N 90.307,93.443 r0 top value=1.5nF
C64 "100nF" CAPC2013X100N 86.249,93.443 r0 top value=1.5nF
C65 "100nF" CAPC2013X100N 82.191,93.443 r0 top value=1.5nF
C66 "100nF" CAPC2013X100N 94.365,93.443 r0 top value=1.5nF
C67 "1uF" CAPC2013X100N 106.539,93.443 r0 top value=1.5nF
C68 "100nF" CAPC2013X100N 102.481,93.443 r0 top value=1.5nF
C69 "100nF" CAPC2013X100N 98.423,93.443 r0 top value=1.5nF
C70 "100nF" CAPC2013X100N 154.801,97.001 r0 top value=1.5nF
C71 "100nF" CAPC2013X100N 146.685,97.001 r0 top value=1.5nF
C72 "100nF" CAPC2013X100N 142.627,97.001 r0 top value=1.5nF
C73 "100nF" CAPC2013X100N 158.859,97.001 r0 top value=1.5nF
C74 "1uF" CAPC2013X100N 138.569,97.001 r0 top value=1.5nF
C75 "100nF" CAPC2013X100N 146.783,77.701 r0 top value=1.5nF
C76 "100nF" CAPC2013X100N 162.917,97.001 r0 top value=1.5nF
C77 "100nF" CAPC2013X100N 150.841,77.701 r0 top value=1.5nF
C78 "100nF" CAPC2013X100N 86.249,90.885 r0 top value=1.5nF
C79 "100nF" CAPC2013X100N 82.191,90.885 r0 top value=1.5nF
C? "100nF" CAPC2013X100N 110.505,28.101 r0 top value=1.5nF
C? "100nF" CAPC2013X100N 33.495,90.885 r0 top value=1.5nF
D1 "BAS416" SOD2512X110N 135.195,90.91 r0 top
D7 "BZT52C2V7" SOD3715X145N 94.3,36.375 r90 top
D8 "BAS416" SOD2512X110N 139.753,90.91 r0 top
J1 "54104-3633" MOLX-54104-3633 84.225,30.15 r0 top
L1 "2.2uH" IND_MURATA-PS_8200 45.675,40.425 r0 top value=22uH
L2 "2.2uH" IND_MURATA-PS_8200 46.65,46.375 r0 top value=22uH
L3 "4.7uH" IND_MURATA-PS_8200 104.575,35.575 r0 top value=22uH
L4 "4.7uH" IND_MURATA-PS_8200 105.1,28.95 r0 top value=22uH
L5 "4.7uH" IND_MURATA-PS_8200 46.9,71.175 r0 top value=22uH
LD1 "Super Red" LED_OSRAM_LSR976 144.436,90.935 r0 top
LD2 "Super Red" LED_OSRAM_LSR976 107.866,102.009 r90 top
LD3 "Super Red" LED_OSRAM_LSR976 110.324,102.009 r90 top
LD4 "Super Red" LED_OSRAM_LSR976 93.576,102.009 r90 top
LD5 "Super Red" LED_OSRAM_LSR976 91.118,102.009 r90 top
LD6 "Super Red" LED_OSRAM_LSR976 88.66,102.009 r90 top
LD7 "Super Red" LED_OSRAM_LSR976 100.95,102.009 r90 top
LD8 "Super Red" LED_OSRAM_LSR976 98.492,102.009 r90 top
LD9 "Super Red" LED_OSRAM_LSR976 96.034,102.009 r90 top
OSC1 "50MHz" OSC_IQD_CFPS-69 63.7,43.55 r0 top
OSC2 "25MHz" OSC_IQD_CFPS-69 59.95,70.76 r270 top value=50MHz
P1 "Header 6" HDR1X6 53.83,29.05 r0 top
P2 "3V3 GPIO" HDR2X20 100.44,78.69 r180 top
P4 "1827059-3" TE_1827059-3 30.3,58.35 r270 top
R1 "22R" RESC1608X55N 71.4,39.825 r90 bottom value=100k
R1 "22R" RESC1608X55N 74.925,39.85 r90 bottom value=100k
R1 "22R" RESC1608X55N 78.5,39.875 r90 bottom value=100k
R1 "22R" RESC1608X55N 82.05,39.825 r90 bottom value=100k
R1 "22R" RESC1608X55N 85.615,39.8 r90 bottom value=100k
R2 "160R" RESC1608X55N 71.375,39.85 r270 top value=100k
R2 "160R" RESC1608X55N 74.95,39.85 r270 top value=100k
R2 "160R" RESC1608X55N 78.5,39.875 r270 top value=100k
R2 "160R" RESC1608X55N 82.075,39.825 r270 top value=100k
R2 "160R" RESC1608X55N 85.615,39.8 r270 top value=100k
R3 "51R" RESC1608X55N 71.375,36.775 r90 bottom value=100k
R3 "51R" RESC1608X55N 74.925,36.825 r90 bottom value=100k
R3 "51R" RESC1608X55N 78.495,36.875 r90 bottom value=100k
R3 "51R" RESC1608X55N 82.05,36.825 r90 bottom value=100k
R3 "51R" RESC1608X55N 85.615,36.775 r90 bottom value=100k
R4 "51R" RESC1608X55N 73.2,36.775 r270 bottom value=100k
R4 "51R" RESC1608X55N 76.675,36.825 r270 bottom value=100k
R4 "51R" RESC1608X55N 80.325,36.825 r270 bottom value=100k
R4 "51R" RESC1608X55N 83.875,36.825 r270 bottom value=100k
R4 "51R" RESC1608X55N 87.415,36.775 r270 bottom value=100k
R5 "160R" RESC1608X55N 73.2,39.85 r270 top value=100k
R5 "160R" RESC1608X55N 76.675,39.84 r270 top value=100k
R5 "160R" RESC1608X55N 80.275,39.825 r270 top value=100k
R5 "160R" RESC1608X55N 83.85,39.825 r270 top value=100k
R5 "160R" RESC1608X55N 87.415,39.825 r270 top value=100k
R6 "22R" RESC1608X55N 73.225,39.825 r270 bottom value=100k
R6 "22R" RESC1608X55N 76.725,39.85 r270 bottom value=100k
R6 "22R" RESC1608X55N 80.3,39.85 r270 bottom value=100k
R6 "22R" RESC1608X55N 83.875,39.825 r270 bottom value=100k
R6 "22R" RESC1608X55N 87.415,39.825 r270 bottom value=100k
R7 "1K" RESC1608X55N 167.15,88.9 r0 top value=100k
R8 "1K" RESC1608X55N 162.675,87.625 r0 top value=100k
R9 "4.7K" RESC1608X55N 153.133,67.835 r0 top value=100k
R10 "4.7K" RESC1608X55N 32.611,96.501 r90 top value=100k
R11 "4.7K" RESC1608X55N 39.361,88.577 r0 top value=100k
R12 "4.7K" RESC1608X55N 40.843,96.501 r90 top value=100k
R13 "4.7K" RESC1608X55N 42.901,96.501 r90 top value=100k
R14 "100k" RESC1608X55N 44.959,96.501 r90 top
R15 "4.7K" RESC1608X55N 34.669,96.501 r90 top value=100k
R16 "3.3K" RESC1608X55N 36.727,96.501 r90 top value=100k
R17 "1M" RESC1608X55N 38.785,96.501 r90 top value=100k
R18 "280k" RESC1608X55N 152.175,83.2 r90 top value=100k
R19 "200k" RESC1608X55N 155.27,102.159 r90 top value=100k
R20 "100" RESC1608X55N 157.328,102.159 r90 top value=100k
R21 "100" RESC1608X55N 35.803,88.577 r0 top value=100k
R22 "200k" RESC1608X55N 159.386,102.159 r90 top value=100k
R23 "200k" RESC1608X55N 149.096,102.159 r90 top value=100k
R24 "100" RESC1608X55N 151.154,102.159 r90 top value=100k
R25 "200k" RESC1608X55N 153.212,102.159 r90 top value=100k
R26 "200k" RESC1608X55N 161.444,102.159 r90 top value=100k
R27 "100" RESC1608X55N 145.426,82.859 r90 top value=100k
R28 "100k" RESC1608X55N 147.484,82.859 r90 top
R29 "100" RESC1608X55N 149.542,82.859 r90 top value=100k
R30 "4.7K" RESC1608X55N 163.502,102.159 r90 top value=100k
R31 "240R" RESC1608X55N 105.075,51.85 r90 top value=100k
R32 "4.7k" RESC1608X55N 165.56,102.159 r90 top value=100k
R33 "4.7k" RESC1608X55N 143.368,82.859 r90 top value=100k
R34 "3.3k" RESC1608X55N 47.017,96.501 r90 top value=100k
R35 "4.7k" RESC1608X55N 110.815,96.501 r90 top value=100k
R36 "3.3k" RESC1608X55N 108.757,96.501 r90 top value=100k
R37 "3.3k" RESC1608X55N 112.873,96.501 r90 top value=100k
R38 "1k" RESC1608X55N 116.989,96.501 r90 top value=100k
R39 "3.3k" RESC1608X55N 114.931,96.501 r90 top value=100k
R40 "3.3k" RESC1608X55N 100.525,96.501 r90 top value=100k
R41 "3.3k" RESC1608X55N 42.919,88.577 r0 top value=100k
R42 "1k" RESC1608X55N 98.467,96.501 r90 top value=100k
R43 "3.3k" RESC1608X55N 102.583,96.501 r90 top value=100k
R44 "3.3k" RESC1608X55N 106.699,96.501 r90 top value=100k
R45 "4.7k" RESC1608X55N 104.641,96.501 r90 top value=100k
R46 "4.7k" RESC1608X55N 119.047,96.501 r90 top value=100k
R47 "4.7k" RESC1608X55N 135.511,96.501 r90 top value=100k
R48 "4.7k" RESC1608X55N 133.453,96.501 r90 top value=100k
R49 "4.7k" RESC1608X55N 131.395,96.501 r90 top value=100k
R50 "47k" RESC1608X55N 123.163,96.501 r90 top value=100k
R51 "47k" RESC1608X55N 25.129,88.577 r0 top value=100k
R52 "47k" RESC1608X55N 125.221,96.501 r90 top value=100k
R53 "100" RESC1608X55N 129.337,96.501 r90 top value=100k
R54 "47k" RESC1608X55N 127.279,96.501 r90 top value=100k
R55 "27k" RESC1608X55N 96.409,96.501 r90 top value=100k
R56 "47k" RESC1608X55N 59.365,96.501 r90 top value=100k
R57 "0R" RESC1608X55N 57.307,96.501 r90 top value=100k
R58 "10k" RESC1608X55N 86.119,96.501 r90 top value=100k
R59 "1k" RESC1608X55N 75.829,96.501 r90 top value=100k
R60 "51R" RESC1608X55N 79.945,96.501 r90 top value=100k
R61 "4.7k" RESC1608X55N 156.691,67.835 r0 top value=100k
R62 "4.7k" RESC1608X55N 82.003,96.501 r90 top value=100k
R63 "51R" RESC1608X55N 77.887,96.501 r90 top value=100k
R64 "51R" RESC1608X55N 73.771,96.501 r90 top value=100k
R65 "51R" RESC1608X55N 84.061,96.501 r90 top value=100k
R66 "51R" RESC1608X55N 92.293,96.501 r90 top value=100k
R67 "51R" RESC1608X55N 94.351,96.501 r90 top value=100k
R68 "51R" RESC1608X55N 90.235,96.501 r90 top value=100k
R69 "51R" RESC1608X55N 88.177,96.501 r90 top value=100k
R70 "3.3k" RESC1608X55N 71.713,96.501 r90 top value=100k
R71 "3.3k" RESC1608X55N 32.245,88.577 r0 top value=100k
R72 "3.3k" RESC1608X55N 55.249,96.501 r90 top value=100k
R73 "0R" RESC1608X55N 53.191,96.501 r90 top value=100k
R74 "4.7k" RESC1608X55N 49.075,96.501 r90 top value=100k
R75 "1k" RESC1608X55N 51.133,96.501 r90 top value=100k
R76 "4.7K" RESC1608X55N 67.597,96.501 r90 top value=100k
R77 "4.7K" RESC1608X55N 69.655,96.501 r90 top value=100k
R78 "4.7K" RESC1608X55N 65.539,96.501 r90 top value=100k
R79 "4.7K" RESC1608X55N 61.423,96.501 r90 top value=100k
R80 "4.7K" RESC1608X55N 63.481,96.501 r90 top value=100k
R81 "4.7K" RESC1608X55N 28.687,88.577 r0 top value=100k
R82 "4.7K" RESC1608X55N 121.105,96.501 r90 top value=100k
R? "1M" RESC1608X55N 115.081,28.376 r0 top value=100k
T1 "2N7002" SOT95P240X130-3N 39.65,67.75 r0 top
U "LM26480SQ-AA" QFN400X400X80-25N 39.85,45.1 r90 top
U1 "XC6SLX16-2FTG256C" FTG256 81.2,53.975 r180 top
U2 "M25P80-VMN6P" MICT-MN-8_N 75.525,70.125 r180 top
U4 "CP2103-GM" SLAB-QFN-28-3125x3125TP_A_L 41.85,34.45 r0 top
U5 "TPS61040DBVR" TI-DBV5_L 97.725,37.975 r0 top
U6 "TPS61040DBVR" TI-DBV5_L 100.425,33.15 r0 top
U7 "MT41J256M16HA-125" MICT-HA-96 99.275,55.325 r0 top
U8 "24AA02HT-I/OT" SOT-23-OT5_L 64.975,37.15 r180 top
U9 "ADV7611" QFP50P1200X1200X120-65N-S415 59.45,60.5 r0 top
U10 "TPD12S520DBTR" DBT38_L 44.625,56.85 r180 top
U15 "USB4105-GF-A" GCT_USB4105-GF-A 27.57,35.99 r270 top

## Footprints (in the part's own frame and the unit in brackets; to place one, negate y for a bottom-side part, rotate by r counter-clockwise, add the part's x,y. Pads: shape width x height; smd on the part's side, far side on the other; paste and mask are expansions set on the pad)
CAPC2013X100N [mm] "Capacitor, Non-Polarized, Chip; 2.00mm L X 1.25mm W X 0.9mm H, IPC Medium Density"
  rect 1.15x1.45 smd: 1(-0.9,0) 2(0.9,0)
  silkscreen extent 0,-0.62 0,0.62, body extent -1.1,-0.72 1.1,0.73, height 1
DBT38_L [mm] "TSSOP, 38-Leads, Body 9.7x4.4mm, Pitch 0.5mm, IPC High Density"
  oval 1.5x0.25 smd: 1(-2.75,4.5) 2(-2.75,4) 3(-2.75,3.5) 4(-2.75,3) 5(-2.75,2.5) 6(-2.75,2) 7(-2.75,1.5) 8(-2.75,1) 9(-2.75,0.5) 10(-2.75,0) 11(-2.75,-0.5) 12(-2.75,-1) 13(-2.75,-1.5) 14(-2.75,-2) 15(-2.75,-2.5) 16(-2.75,-3) 17(-2.75,-3.5) 18(-2.75,-4) 19(-2.75,-4.5) 20(2.75,-4.5) 21(2.75,-4) 22(2.75,-3.5) 23(2.75,-3) 24(2.75,-2.5) 25(2.75,-2) 26(2.75,-1.5) 27(2.75,-1) 28(2.75,-0.5) 29(2.75,0) 30(2.75,0.5) 31(2.75,1) 32(2.75,1.5) 33(2.75,2) 34(2.75,2.5) 35(2.75,3) 36(2.75,3.5) 37(2.75,4) 38(2.75,4.5)
  silkscreen extent -2.88,-4.9 1.6,5.3, body extent -2.25,-4.9 2.25,4.9, height 1.2
FTG256 [mm] "BGA, 256-Leads, Body 17x17mm, Pitch 1mm"
  round 0.45 smd: A1(-7.5,7.5) A2(-6.5,7.5) A3(-5.5,7.5) A4(-4.5,7.5) A5(-3.5,7.5) A6(-2.5,7.5) A7(-1.5,7.5) A8(-0.5,7.5) A9(0.5,7.5) A10(1.5,7.5) A11(2.5,7.5) A12(3.5,7.5) A13(4.5,7.5) A14(5.5,7.5) A15(6.5,7.5) A16(7.5,7.5) B1(-7.5,6.5) B2(-6.5,6.5) B3(-5.5,6.5) B4(-4.5,6.5) B5(-3.5,6.5) B6(-2.5,6.5) B7(-1.5,6.5) B8(-0.5,6.5) B9(0.5,6.5) B10(1.5,6.5) B11(2.5,6.5) B12(3.5,6.5) B13(4.5,6.5) B14(5.5,6.5) B15(6.5,6.5) B16(7.5,6.5) C1(-7.5,5.5) C2(-6.5,5.5) C3(-5.5,5.5) C4(-4.5,5.5) C5(-3.5,5.5) C6(-2.5,5.5) C7(-1.5,5.5) C8(-0.5,5.5) C9(0.5,5.5) C10(1.5,5.5) C11(2.5,5.5) C12(3.5,5.5) C13(4.5,5.5) C14(5.5,5.5) C15(6.5,5.5) C16(7.5,5.5) D1(-7.5,4.5) D2(-6.5,4.5) D3(-5.5,4.5) D4(-4.5,4.5) D5(-3.5,4.5) D6(-2.5,4.5) D7(-1.5,4.5) D8(-0.5,4.5) D9(0.5,4.5) D10(1.5,4.5) D11(2.5,4.5) D12(3.5,4.5) D13(4.5,4.5) D14(5.5,4.5) D15(6.5,4.5) D16(7.5,4.5) E1(-7.5,3.5) E2(-6.5,3.5) E3(-5.5,3.5) E4(-4.5,3.5) E5(-3.5,3.5) E6(-2.5,3.5) E7(-1.5,3.5) E8(-0.5,3.5) E9(0.5,3.5) E10(1.5,3.5) E11(2.5,3.5) E12(3.5,3.5) E13(4.5,3.5) E14(5.5,3.5) E15(6.5,3.5) E16(7.5,3.5) F1(-7.5,2.5) F2(-6.5,2.5) F3(-5.5,2.5) F4(-4.5,2.5) F5(-3.5,2.5) F6(-2.5,2.5) F7(-1.5,2.5) F8(-0.5,2.5) F9(0.5,2.5) F10(1.5,2.5) F11(2.5,2.5) F12(3.5,2.5) F13(4.5,2.5) F14(5.5,2.5) F15(6.5,2.5) F16(7.5,2.5) G1(-7.5,1.5) G2(-6.5,1.5) G3(-5.5,1.5) G4(-4.5,1.5) G5(-3.5,1.5) G6(-2.5,1.5) G7(-1.5,1.5) G8(-0.5,1.5) G9(0.5,1.5) G10(1.5,1.5) G11(2.5,1.5) G12(3.5,1.5) G13(4.5,1.5) G14(5.5,1.5) G15(6.5,1.5) G16(7.5,1.5) H1(-7.5,0.5) H2(-6.5,0.5) H3(-5.5,0.5) H4(-4.5,0.5) H5(-3.5,0.5) H6(-2.5,0.5) H7(-1.5,0.5) H8(-0.5,0.5) H9(0.5,0.5) H10(1.5,0.5) H11(2.5,0.5) H12(3.5,0.5) H13(4.5,0.5) H14(5.5,0.5) H15(6.5,0.5) H16(7.5,0.5) J1(-7.5,-0.5) J2(-6.5,-0.5) J3(-5.5,-0.5) J4(-4.5,-0.5) J5(-3.5,-0.5) J6(-2.5,-0.5) J7(-1.5,-0.5) J8(-0.5,-0.5) J9(0.5,-0.5) J10(1.5,-0.5) J11(2.5,-0.5) J12(3.5,-0.5) J13(4.5,-0.5) J14(5.5,-0.5) J15(6.5,-0.5) J16(7.5,-0.5) K1(-7.5,-1.5) K2(-6.5,-1.5) K3(-5.5,-1.5) K4(-4.5,-1.5) K5(-3.5,-1.5) K6(-2.5,-1.5) K7(-1.5,-1.5) K8(-0.5,-1.5) K9(0.5,-1.5) K10(1.5,-1.5) K11(2.5,-1.5) K12(3.5,-1.5) K13(4.5,-1.5) K14(5.5,-1.5) K15(6.5,-1.5) K16(7.5,-1.5) L1(-7.5,-2.5) L2(-6.5,-2.5) L3(-5.5,-2.5) L4(-4.5,-2.5) L5(-3.5,-2.5) L6(-2.5,-2.5) L7(-1.5,-2.5) L8(-0.5,-2.5) L9(0.5,-2.5) L10(1.5,-2.5) L11(2.5,-2.5) L12(3.5,-2.5) L13(4.5,-2.5) L14(5.5,-2.5) L15(6.5,-2.5) L16(7.5,-2.5) M1(-7.5,-3.5) M2(-6.5,-3.5) M3(-5.5,-3.5) M4(-4.5,-3.5) M5(-3.5,-3.5) M6(-2.5,-3.5) M7(-1.5,-3.5) M8(-0.5,-3.5) M9(0.5,-3.5) M10(1.5,-3.5) M11(2.5,-3.5) M12(3.5,-3.5) M13(4.5,-3.5) M14(5.5,-3.5) M15(6.5,-3.5) M16(7.5,-3.5) N1(-7.5,-4.5) N2(-6.5,-4.5) N3(-5.5,-4.5) N4(-4.5,-4.5) N5(-3.5,-4.5) N6(-2.5,-4.5) N7(-1.5,-4.5) N8(-0.5,-4.5) N9(0.5,-4.5) N10(1.5,-4.5) N11(2.5,-4.5) N12(3.5,-4.5) N13(4.5,-4.5) N14(5.5,-4.5) N15(6.5,-4.5) N16(7.5,-4.5) P1(-7.5,-5.5) P2(-6.5,-5.5) P3(-5.5,-5.5) P4(-4.5,-5.5) P5(-3.5,-5.5) P6(-2.5,-5.5) P7(-1.5,-5.5) P8(-0.5,-5.5) P9(0.5,-5.5) P10(1.5,-5.5) P11(2.5,-5.5) P12(3.5,-5.5) P13(4.5,-5.5) P14(5.5,-5.5) P15(6.5,-5.5) P16(7.5,-5.5) R1(-7.5,-6.5) R2(-6.5,-6.5) R3(-5.5,-6.5) R4(-4.5,-6.5) R5(-3.5,-6.5) R6(-2.5,-6.5) R7(-1.5,-6.5) R8(-0.5,-6.5) R9(0.5,-6.5) R10(1.5,-6.5) R11(2.5,-6.5) R12(3.5,-6.5) R13(4.5,-6.5) R14(5.5,-6.5) R15(6.5,-6.5) R16(7.5,-6.5) T1(-7.5,-7.5) T2(-6.5,-7.5) T3(-5.5,-7.5) T4(-4.5,-7.5) T5(-3.5,-7.5) T6(-2.5,-7.5) T7(-1.5,-7.5) T8(-0.5,-7.5) T9(0.5,-7.5) T10(1.5,-7.5) T11(2.5,-7.5) T12(3.5,-7.5) T13(4.5,-7.5) T14(5.5,-7.5) T15(6.5,-7.5) T16(7.5,-7.5)
  silkscreen extent -9.28,-8.5 8.5,8.5, body extent -8.5,-8.5 8.5,8.5, height 1.55
GCT_USB4105-GF-A [mm]
  rect 0.6x1.15 smd: A1/B12(-3.2,4.755) A4/B9(-2.4,4.755) B1/A12(3.2,4.755) B4/A9(2.4,4.755)
  rect 0.3x1.15 smd: A5(-1.25,4.755) A6(-0.25,4.755) A7(0.25,4.755) A8(1.25,4.755) B5(1.75,4.755) B6(0.75,4.755) B7(-0.75,4.755) B8(-1.75,4.755)
  oval 1x2 hole 0.6 slot 1.4 at 90 deg: G1(-4.32,0) G2(4.32,0)
  oval 1.05x2.1 hole 0.6 slot 1.7 at 90 deg: G3(-4.32,4.18) G4(4.32,4.18)
  round 0.65 hole 0.65 unplated: ""(-2.89,3.68) ""(2.89,3.68)
  silkscreen extent -4.79,-2.6 4.79,2.65, body extent -7.24,-2.71 4.79,5, height 3.32
HDR1X6 [mm] "Connector; Header; 6 Position"
  rect 1.5x1.5 hole 0.9: 1(0,0)
  round 1.5 hole 0.9: 2(2.54,0) 3(5.08,0) 4(7.62,0) 5(10.16,0) 6(12.7,0)
  silkscreen extent -1.27,-1.27 13.97,1.27
HDR2X20 [mm] "Connector; Header; 20x2 Position"
  rect 1.5x1.5 hole 0.9: 1(0,0)
  round 1.5 hole 0.9: 2(0,2.54) 3(2.54,0) 4(2.54,2.54) 5(5.08,0) 6(5.08,2.54) 7(7.62,0) 8(7.62,2.54) 9(10.16,0) 10(10.16,2.54) 11(12.7,0) 12(12.7,2.54) 13(15.24,0) 14(15.24,2.54) 15(17.78,0) 16(17.78,2.54) 17(20.32,0) 18(20.32,2.54) 19(22.86,0) 20(22.86,2.54) 21(25.4,0) 22(25.4,2.54) 23(27.94,0) 24(27.94,2.54) 25(30.48,0) 26(30.48,2.54) 27(33.02,0) 28(33.02,2.54) 29(35.56,0) 30(35.56,2.54) 31(38.1,0) 32(38.1,2.54) 33(40.64,0) 34(40.64,2.54) 35(43.18,0) 36(43.18,2.54) 37(45.72,0) 38(45.72,2.54) 39(48.26,0) 40(48.26,2.54)
  silkscreen extent -1.27,-1.27 49.53,3.81
IND_MURATA-PS_8200 [mm] "Miniature Surface Mount Power Inductors, 3.2mm L X 2.5mm W X 2.3mm H, MURATA 8200 Series"
  rect 1.52x2.7 smd: 1(-1.145,0) 2(1.145,0)
  silkscreen extent 0,-1.25 0,1.25, body extent -1.6,-1.25 1.6,1.25, height 2.3
LED_OSRAM_LSR976 [mm] "Super Red Chip LED, 2-Leads, Body 2.0x1.25mm, IPC Medium Density"
  rect 0.9x1.4 smd: 1(-0.95,0) 2(0.95,0)
  silkscreen extent -2.02,-0.65 0,0.65, body extent -1.05,-0.67 1.05,0.68, height 0.9
MICT-HA-96 [mm] "BGA, 96-Balls, Body 14x9mm, Pitch 0.8mm"
  round 0.4 smd: A1(-3.2,6) A2(-2.4,6) A3(-1.6,6) A7(1.6,6) A8(2.4,6) A9(3.2,6) B1(-3.2,5.2) B2(-2.4,5.2) B3(-1.6,5.2) B7(1.6,5.2) B8(2.4,5.2) B9(3.2,5.2) C1(-3.2,4.4) C2(-2.4,4.4) C3(-1.6,4.4) C7(1.6,4.4) C8(2.4,4.4) C9(3.2,4.4) D1(-3.2,3.6) D2(-2.4,3.6) D3(-1.6,3.6) D7(1.6,3.6) D8(2.4,3.6) D9(3.2,3.6) E1(-3.2,2.8) E2(-2.4,2.8) E3(-1.6,2.8) E7(1.6,2.8) E8(2.4,2.8) E9(3.2,2.8) F1(-3.2,2) F2(-2.4,2) F3(-1.6,2) F7(1.6,2) F8(2.4,2) F9(3.2,2) G1(-3.2,1.2) G2(-2.4,1.2) G3(-1.6,1.2) G7(1.6,1.2) G8(2.4,1.2) G9(3.2,1.2) H1(-3.2,0.4) H2(-2.4,0.4) H3(-1.6,0.4) H7(1.6,0.4) H8(2.4,0.4) H9(3.2,0.4) J1(-3.2,-0.4) J2(-2.4,-0.4) J3(-1.6,-0.4) J7(1.6,-0.4) J8(2.4,-0.4) J9(3.2,-0.4) K1(-3.2,-1.2) K2(-2.4,-1.2) K3(-1.6,-1.2) K7(1.6,-1.2) K8(2.4,-1.2) K9(3.2,-1.2) L1(-3.2,-2) L2(-2.4,-2) L3(-1.6,-2) L7(1.6,-2) L8(2.4,-2) L9(3.2,-2) M1(-3.2,-2.8) M2(-2.4,-2.8) M3(-1.6,-2.8) M7(1.6,-2.8) M8(2.4,-2.8) M9(3.2,-2.8) N1(-3.2,-3.6) N2(-2.4,-3.6) N3(-1.6,-3.6) N7(1.6,-3.6) N8(2.4,-3.6) N9(3.2,-3.6) P1(-3.2,-4.4) P2(-2.4,-4.4) P3(-1.6,-4.4) P7(1.6,-4.4) P8(2.4,-4.4) P9(3.2,-4.4) R1(-3.2,-5.2) R2(-2.4,-5.2) R3(-1.6,-5.2) R7(1.6,-5.2) R8(2.4,-5.2) R9(3.2,-5.2) T1(-3.2,-6) T2(-2.4,-6) T3(-1.6,-6) T7(1.6,-6) T8(2.4,-6) T9(3.2,-6)
  silkscreen extent -5.27,-7 4.5,7, body extent -4.5,-7 4.5,7, height 0.1
MICT-MN-8_N [mm] "SOIC, 8-Leads, Body 5x4mm, Pitch 1.27mm, IPC Medium Density"
  oval 2.2x0.6 smd: 1(-2.4,1.905) 2(-2.4,0.635) 3(-2.4,-0.635) 4(-2.4,-1.905) 5(2.4,-1.905) 6(2.4,-0.635) 7(2.4,0.635) 8(2.4,1.905)
  silkscreen extent -2.53,-2.5 0.9,2.88, body extent -2,-2.5 2,2.5, height 0.1
MOLX-54104-3633 [mm] "FPC Connector, 36-Leads, Right Angle, Pitch 0.5 mm, Mated Height 2.0 mm, SMT"
  rect 0.3x1.2 smd: 1(-8.75,1.35) 2(-8.25,1.35) 3(-7.75,1.35) 4(-7.25,1.35) 5(-6.75,1.35) 6(-6.25,1.35) 7(-5.75,1.35) 8(-5.25,1.35) 9(-4.75,1.35) 10(-4.25,1.35) 11(-3.75,1.35) 12(-3.25,1.35) 13(-2.75,1.35) 14(-2.25,1.35) 15(-1.75,1.35) 16(-1.25,1.35) 17(-0.75,1.35) 18(-0.25,1.35) 19(0.25,1.35) 20(0.75,1.35) 21(1.25,1.35) 22(1.75,1.35) 23(2.25,1.35) 24(2.75,1.35) 25(3.25,1.35) 26(3.75,1.35) 27(4.25,1.35) 28(4.75,1.35) 29(5.25,1.35) 30(5.75,1.35) 31(6.25,1.35) 32(6.75,1.35) 33(7.25,1.35) 34(7.75,1.35) 35(8.25,1.35) 36(8.75,1.35)
  rect 1x1 smd mask+0: MP1(-10.45,-1.35) MP2(10.45,-1.35)
  Top Layer region: 9.65,-2.55 9.65,-0.15 11.25,-0.15 11.25,-0.95 12.05,-0.95 12.05,-2.55
  Top Layer region: -9.65,-2.55 -9.65,-0.15 -11.25,-0.15 -11.25,-0.95 -12.05,-0.95 -12.05,-2.55
  silkscreen extent -11.75,-5.5 11.75,2.62, body extent -11.75,-5.5 11.75,1.65, height 2.06
OSC_IQD_CFPS-69 [mm] "Oscillator, Side Concave, 2.54mm Pitch, 4 Pins, 3.20mm L X 5.00mm W X 1.00mm H, CFPS-69 Series"
  rect 1.55x1.35 smd: 1(-1.35,1.27) 2(-1.35,-1.27) 3(1.35,-1.27) 4(1.35,1.27)
  silkscreen extent -2.32,-2.5 1.6,2.67, body extent -1.7,-2.6 1.7,2.6, height 0.95
QFN400X400X80-25N [mil]
  rect 32x12 smd: 1(-77,49) 2(-77,30) 3(-77,10) 4(-77,-10) 5(-77,-30) 6(-77,-49) 13(77,-49) 14(77,-30) 15(77,-10) 16(77,10) 17(77,30) 18(77,49)
  rect 12x32 smd: 7(-49,-77) 8(-30,-77) 9(-10,-77) 10(10,-77) 11(30,-77) 12(49,-77) 19(49,77) 20(30,77) 21(10,77) 22(-10,77) 23(-30,77) 24(-49,77)
  rect 102x102 smd: 25(0,0)
  silkscreen extent -79,-79 79,79
QFP50P1200X1200X120-65N-S415 [mm] "QFP,0.50mm pitch,square;16 pin X 16 pin,10.00mm X 10.00mm X 1.20mm H body (w/thermal tab 4.15 X 4.15 mm), IPC Medium Density"
  rect 1.55x0.3 smd: 1(-5.7,3.75) 2(-5.7,3.25) 3(-5.7,2.75) 4(-5.7,2.25) 5(-5.7,1.75) 6(-5.7,1.25) 7(-5.7,0.75) 8(-5.7,0.25) 9(-5.7,-0.25) 10(-5.7,-0.75) 11(-5.7,-1.25) 12(-5.7,-1.75) 13(-5.7,-2.25) 14(-5.7,-2.75) 15(-5.7,-3.25) 16(-5.7,-3.75) 33(5.7,-3.75) 34(5.7,-3.25) 35(5.7,-2.75) 36(5.7,-2.25) 37(5.7,-1.75) 38(5.7,-1.25) 39(5.7,-0.75) 40(5.7,-0.25) 41(5.7,0.25) 42(5.7,0.75) 43(5.7,1.25) 44(5.7,1.75) 45(5.7,2.25) 46(5.7,2.75) 47(5.7,3.25) 48(5.7,3.75)
  rect 0.3x1.55 smd: 17(-3.75,-5.7) 18(-3.25,-5.7) 19(-2.75,-5.7) 20(-2.25,-5.7) 21(-1.75,-5.7) 22(-1.25,-5.7) 23(-0.75,-5.7) 24(-0.25,-5.7) 25(0.25,-5.7) 26(0.75,-5.7) 27(1.25,-5.7) 28(1.75,-5.7) 29(2.25,-5.7) 30(2.75,-5.7) 31(3.25,-5.7) 32(3.75,-5.7) 49(3.75,5.7) 50(3.25,5.7) 51(2.75,5.7) 52(2.25,5.7) 53(1.75,5.7) 54(1.25,5.7) 55(0.75,5.7) 56(0.25,5.7) 57(-0.25,5.7) 58(-0.75,5.7) 59(-1.25,5.7) 60(-1.75,5.7) 61(-2.25,5.7) 62(-2.75,5.7) 63(-3.25,5.7) 64(-3.75,5.7)
  rect 4.15x4.15 smd: 65(0,0)
  round 1 smd paste-0.51 mask+0.5: FTG1(-5.7,-5.7) FTG2(5.7,5.7)
  Top Layer keep-out circle w0.1: c5.7,5.7 r1
  Top Layer keep-out circle w0.1: c-5.7,-5.7 r1
  silkscreen extent -6.32,-4.55 4.55,4.55, body extent -6.1,-6.1 6.1,6.1, height 1.2
RESC1608X55N [mm] "Chip Resistor, EIA 0603, Metric 1608, Body 1.6x0.8mm, IPC Medium Density"
  rect 0.9x1 smd: 1(-0.8,0) 2(0.8,0)
  body extent -0.87,-0.47 0.88,0.48, height 0.55
SLAB-QFN-28-3125x3125TP_A_L [mm] "QFN, 28-Leads, Body 5x5mm, Pitch 0.5mm, Thermal Pad 3.13x3.13mm, IPC High Density"
  oval 0.75x0.2 smd: 1(-2.375,1.5) 2(-2.375,1) 3(-2.375,0.5) 4(-2.375,0) 5(-2.375,-0.5) 6(-2.375,-1) 7(-2.375,-1.5) 15(2.375,-1.5) 16(2.375,-1) 17(2.375,-0.5) 18(2.375,0) 19(2.375,0.5) 20(2.375,1) 21(2.375,1.5)
  oval 0.2x0.75 smd: 8(-1.5,-2.375) 9(-1,-2.375) 10(-0.5,-2.375) 11(0,-2.375) 12(0.5,-2.375) 13(1,-2.375) 14(1.5,-2.375) 22(1.5,2.375) 23(1,2.375) 24(0.5,2.375) 25(0,2.375) 26(-0.5,2.375) 27(-1,2.375) 28(-1.5,2.375)
  rect 3.13x3.13 smd: 29(0,0)
  silkscreen extent -3.42,-2.65 2.65,2.65, body extent -2.5,-2.5 2.5,2.5, height 1
SOD2512X110N [mm] "Small Outline Diode Flat Lead (SOD-323), 1.70mm W X 1.25mm L X 1.10mm H body,  IPC Medium Density"
  rect 0.9x0.5 smd: 1(-1.3,0) 2(1.3,0)
  silkscreen extent -1.62,-0.65 0.85,0.87, body extent -1.35,-0.67 1.35,0.68, height 1.1
SOD3715X145N [mm] "SOD Diode (SOD-123); 2.70mm W X 1.55mm L X 1.45mm H body, IPC Medium Density"
  rect 1x0.8 smd: 1(-1.8,0) 2(1.8,0)
  silkscreen extent -2.17,-0.8 1.35,1.02, body extent -1.95,-0.85 1.95,0.85, height 1.45
SOT95P240X130-3N [mm] "SOT23 3-Leads, Pitch 0.95mm - Body 1.3x2.9mm, IPC Medium Density"
  rect 1.05x0.65 smd: 1(-1.15,0.95) 2(-1.15,-0.95) 3(1.15,0)
  silkscreen extent -1.52,-1.45 0.3,1.92, body extent -1.25,-1.5 1.25,1.5, height 1.3
SOT-23-OT5_L [mm] "SOT23, 5-Leads, Body 2.9x1.6mm, Pitch 0.95mm, Lead Span 2.7mm, IPC High Density"
  rect 0.9x0.65 smd: 1(-1.2,0.95) 2(-1.2,0) 3(-1.2,-0.95) 4(1.2,-0.95) 5(1.2,0.95)
  silkscreen extent -1.33,-1.55 0.35,1.95, body extent -0.9,-1.55 0.9,1.55, height 1.45
TE_1827059-3 [mm]
  rect 0.3x2.6 smd: 1(4.5,5) 2(4,5) 3(3.5,5) 4(3,5) 5(2.5,5) 6(2,5) 7(1.5,5) 8(1,5) 9(0.5,5) 10(0,5) 11(-0.5,5) 12(-1,5) 13(-1.5,5) 14(-2,5) 15(-2.5,5) 16(-3,5) 17(-3.5,5) 18(-4,5) 19(-4.5,5)
  oval 1.65x3.3 hole 1 slot 2.5 at 90 deg: S1(7.25,4.24) S2(-7.25,4.24)
  oval 1.35x2.7 hole 1 slot 1.5 at 90 deg: S3(-7.25,-1.72) S4(7.25,-1.72)
  round 1.1 hole 1.1 unplated: ""(-2.5,2.59) ""(2.5,2.59)
  silkscreen extent -7.5,-6.31 7.5,5.86, body extent -7.5,-6.26 7.5,5.84, height 6.09
TI-DBV5_L [mm] "SOT23, 5-Leads, Body 2.9x1.6mm, Pitch 0.95mm, IPC High Density"
  rect 0.9x0.6 smd: 1(-1.2,0.95) 2(-1.2,0) 3(-1.2,-0.95) 4(1.2,-0.95) 5(1.2,0.95)
  silkscreen extent -1.32,-1.55 0.35,1.92, body extent -0.87,-1.52 0.87,1.53, height 1.45